# Allegro board arena_12-12_v3.brd
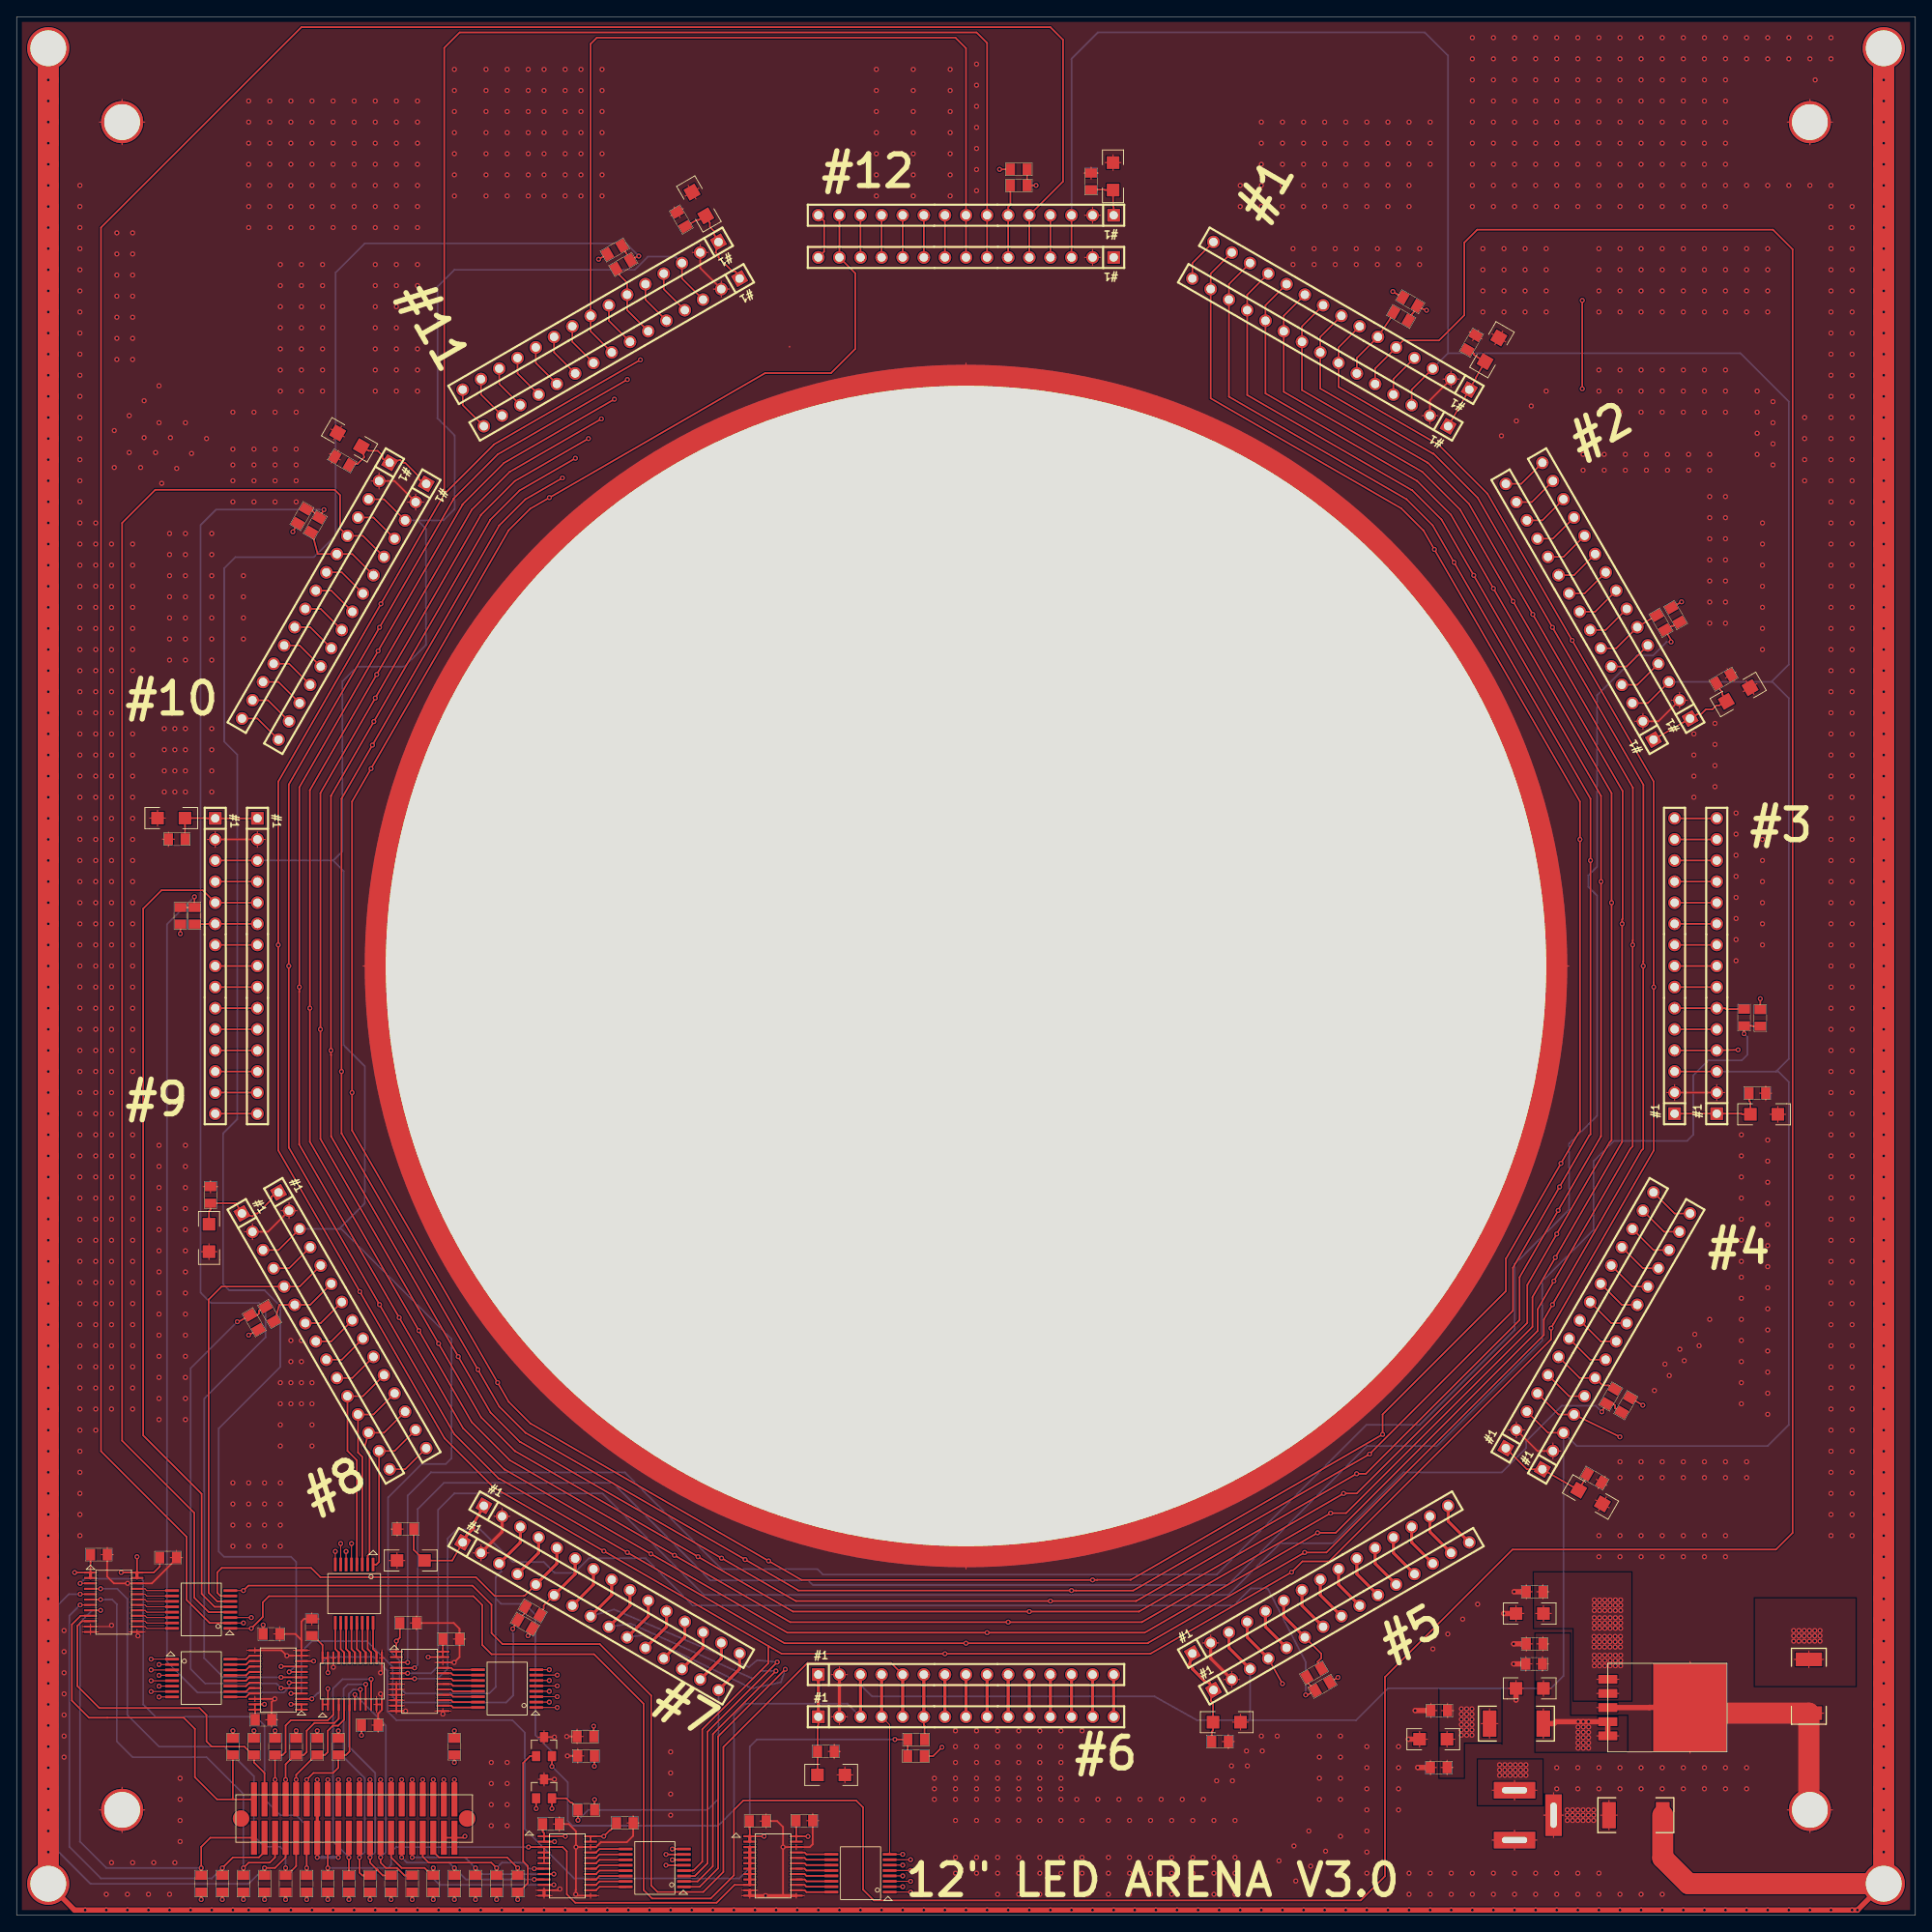
[diagram p0: board, top side]
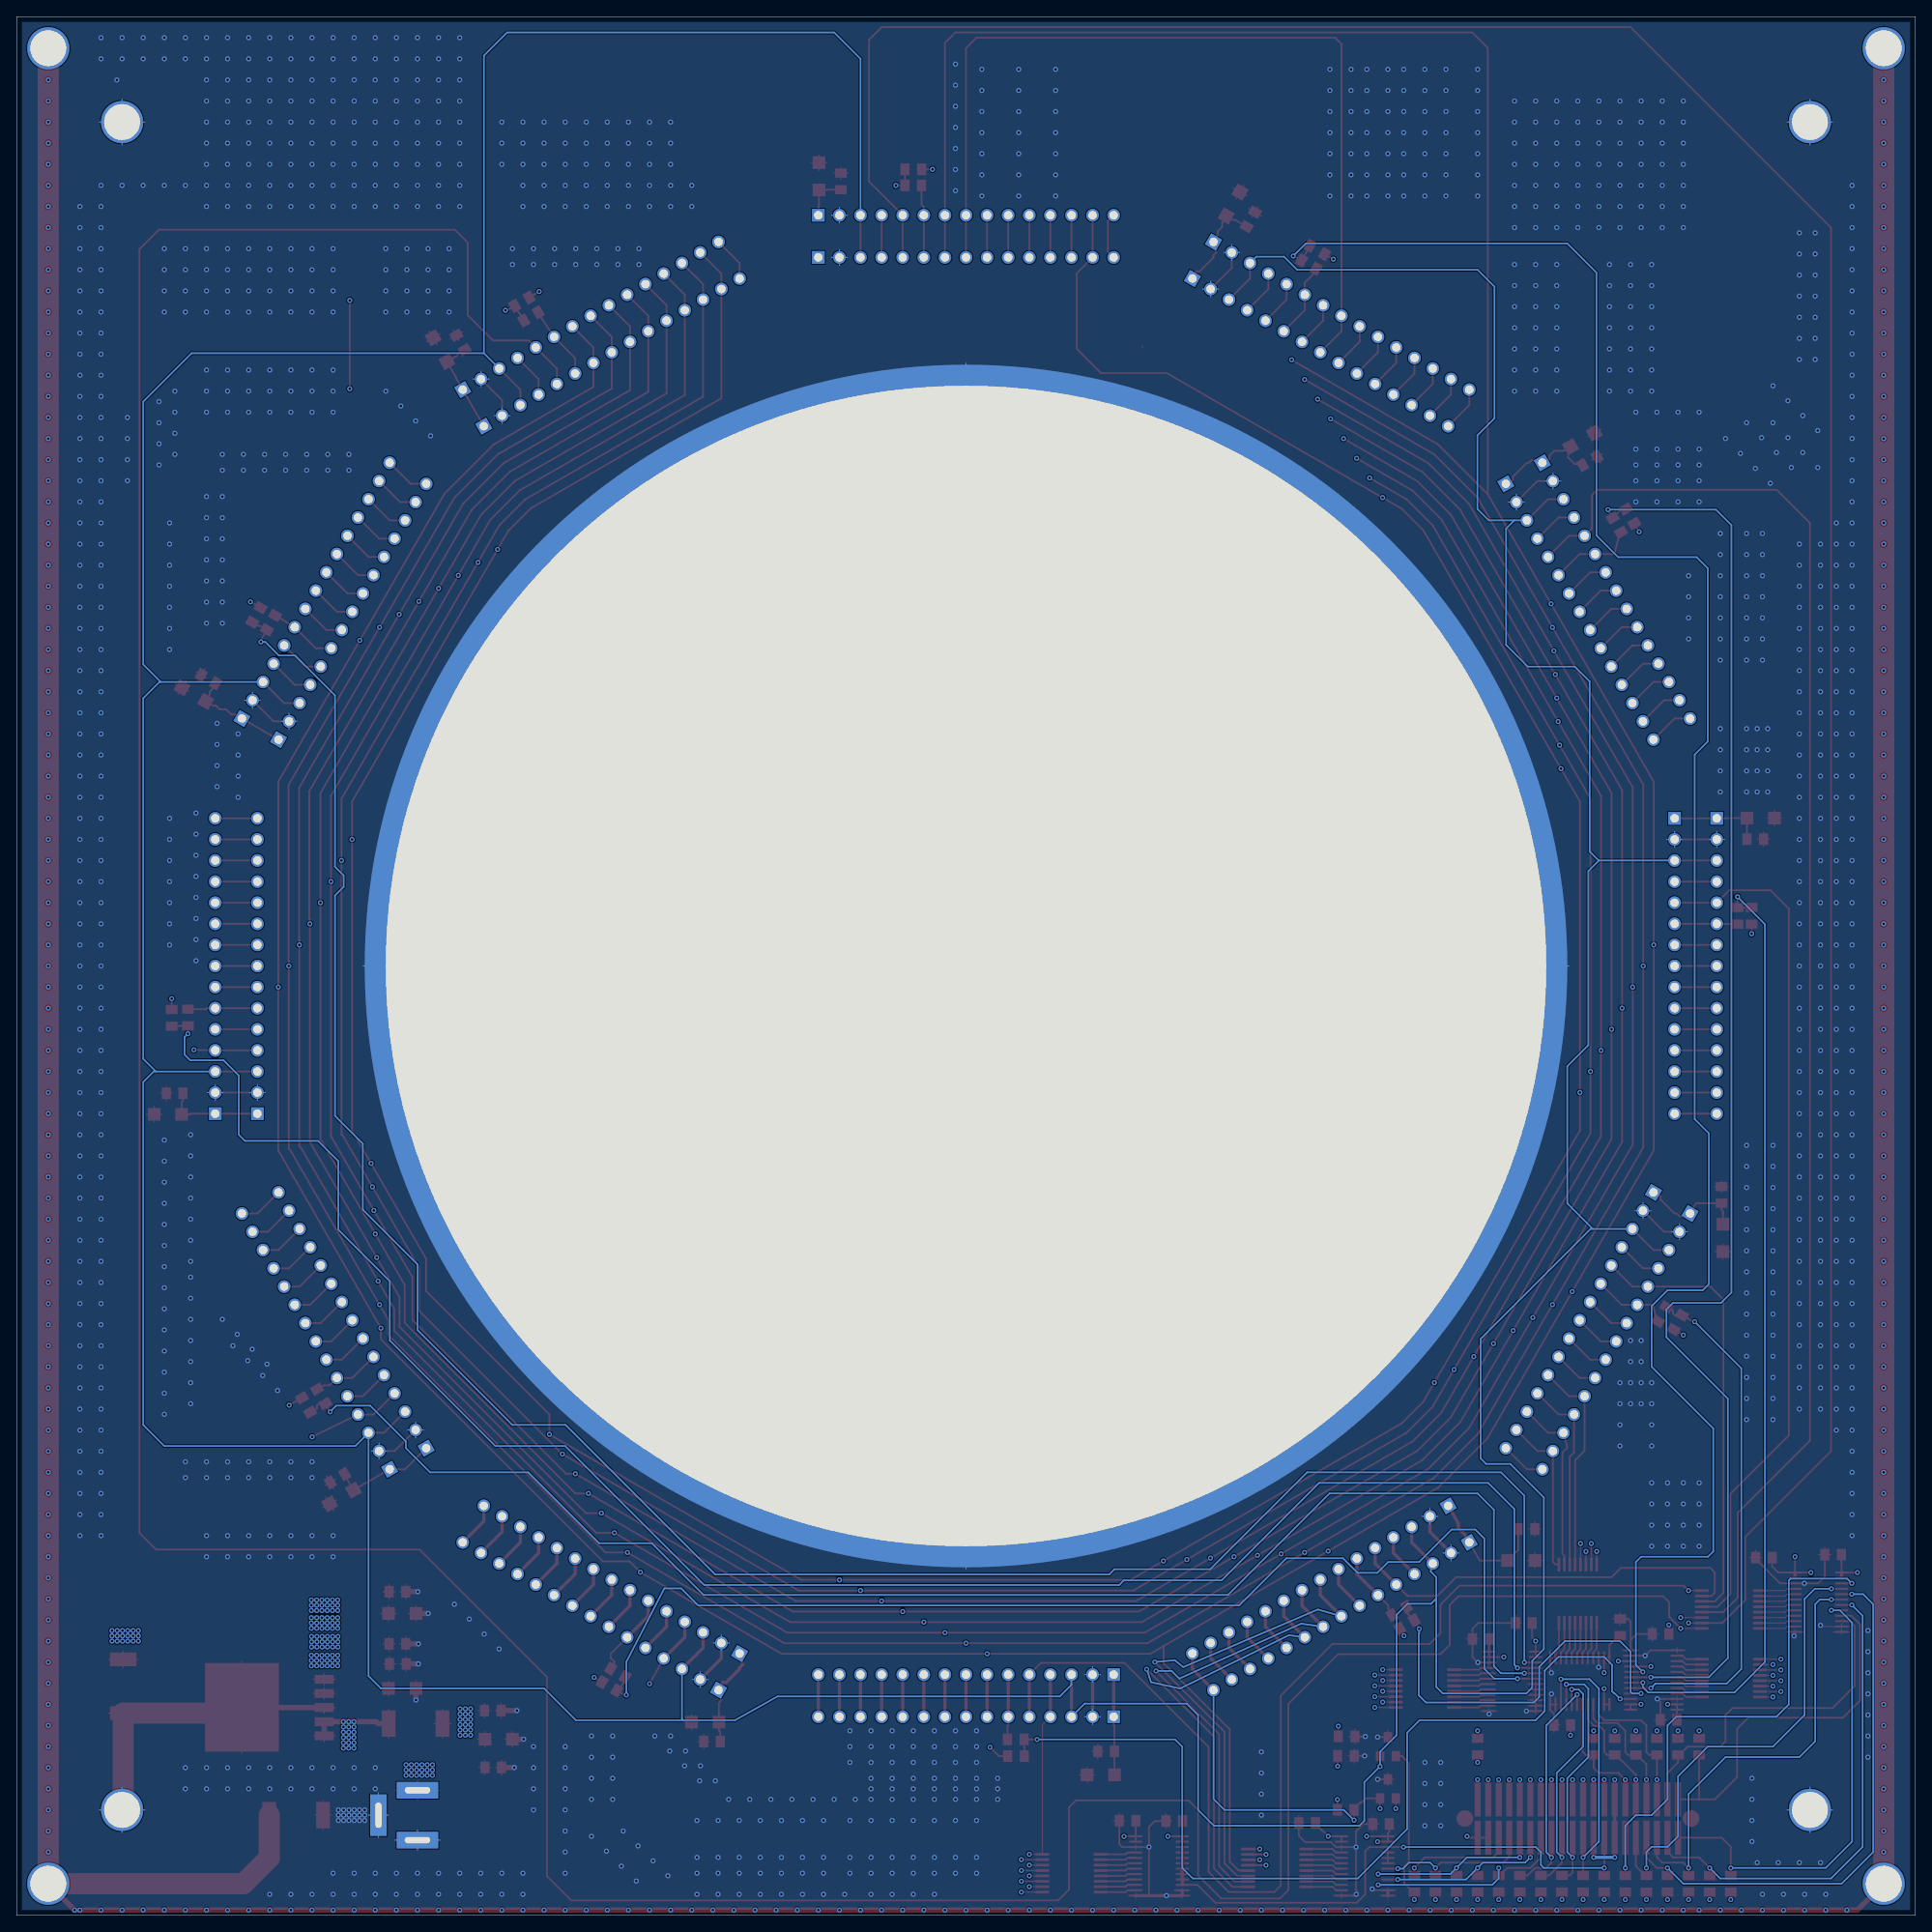
[diagram p1: board, bottom side, seen from below]

Outline 228.6 x 228.6 mm; copper layers: TOP, PWR, LAYER 1, GND2, LAYER 2, BOTTOM. Coordinates in mm from the lower left corner of the outline.
Outline path: 0,228.6 0,0 228.6,0 228.6,228.6 0,228.6

## Design rules (mm)
constraint set DEFAULT: min track width 0.127

## Placement (name value [footprint] x y rotation side)
C1  10uF  [1206]  82.14 206.04 120 top
C2  10uF  [1206]  132 209.37 90 top
C3  0.1uF  [EIA0805]  175.16 189.36 60 top
C4  10uF  [1206]  177.62 188.49 60 top
C5  0.1uF  [EIA0805]  129.36 208.76 90 top
C6  0.1uF  [EIA0805]  80.01 204.19 120 top
C7  0.1uF  [0805]  39.19 175.11 150 top
C8  10uF  [1206]  40.08 177.65 150 top
C9  10uF  [1206]  210.39 96.44 0 top
C10  0.1uF  [EIA0805]  209.58 98.98 0 top
C11  10uF  [1206]  18.62 132.11 180 top
C12  0.1uF  [EIA0805]  19.28 129.57 180 top
C13  10uF  [1206]  189.48 50.37 330 top
C14  0.1uF  [EIA0805]  189.97 52.63 330 top
C15  10uF  [1206]  47.45 42.72 180 top
C16  0.1uF  [EIA0805]  46.81 46.51 180 top
C17  10uF  [1206]  145.69 23.27 0 top
C18  0.1uF  [EIA0805]  144.88 20.93 0 top
C19  0.1uF  [EIA0805]  97.43 19.74 0 top
C20  10uF  [1206]  98.07 16.92 0 top
C21  10uF  [1206]  23.16 81.56 270 top
C22  0.1uF  [EIA0805]  23.34 86.74 90 top
C23  10uF  [1206]  207.26 146.99 30 top
C24  0.1uF  [EIA0805]  205.51 148.84 30 top
C25  0.1uF  [EIA0805]  64.34 11 0 top
C26  0.1uF  [EIA0805]  73.23 11.13 0 top
C27  0.1uF  [EIA0805]  29.72 23.55 0 top
C28  0.1uF  [EIA0805]  35.53 34.7 90 top
C29  0.1uF  [EIA0805]  89.23 11.35 0 top
C30  0.1uF  [EIA0805]  94.84 11.4 0 top
C31  0.1uF  [EIA0805]  42.52 22.91 0 top
C32  0.1uF  [EIA0805]  30.68 33.88 0 top
C33  0.1uF  [EIA0805]  9.91 43.43 0 top
C34  0.1uF  [EIA0805]  18.24 43.08 0 top
C35  0.1uF  [EIA0805]  52.32 33.27 0 top
C36  0.1uF  [EIA0805]  47.14 35.2 0 top
C37  0.1uF  [EIA0805]  182.75 38.96 180 top
C38  10uF  [1206]  182.17 36.35 180 top
C39  10uF/6.3/Elec  [1206]  182.17 27.33 180 top
C40  0.001uF/X5R  [EIA0805]  182.7 30.28 180 top
C41  0.1uF/X5R  [EIA0805]  182.75 32.69 180 top
C42  2.2uF/60/Elec  [1206]  170.56 21.21 180 top
C43  0.01uF/X5R  [EIA0805]  171.22 17.81 180 top
C44  0.1uF/X5R  [EIA0805]  171.27 24.66 180 top
J1  CONN15  [HDR-1X15]  56.25 49.31 330 top
J2  CONN15  [HDR-1X15]  179.29 56.25 60 top
J3  CONN15  [HDR-1X15]  197.07 141.56 120 top
J4  CONN15  [HDR-1X15]  96.52 28.99 0 top
J5  CONN15  [HDR-1X15]  28.99 132.08 270 top
J6  CONN15  [HDR-1X15]  87.04 197.07 210 top
J7  CONN15  [HDR-1X15]  172.35 179.29 150 top
J8  CONN15  [HDR-1X15]  141.56 31.53 30 top
J9  CONN15  [HDR-1X15]  199.61 96.52 90 top
J10  CONN15  [HDR-1X15]  31.53 87.04 300 top
J11  CONN15  [HDR-1X15]  132.08 204.69 180 top
J12  CONN15  [HDR-1X15]  44.91 174.89 240 top
J13  CONN15  [HDR-1X15]  96.52 23.91 0 top
J14  CONN15  [HDR-1X15]  53.71 44.91 330 top
J15  CONN15  [HDR-1X15]  27.13 84.5 300 top
J16  CONN15  [HDR-1X15]  23.91 132.08 270 top
J17  CONN15  [HDR-1X15]  49.31 172.35 240 top
J18  CONN15  [HDR-1X15]  84.5 201.47 210 top
J19  CONN15  [HDR-1X15]  132.08 199.61 180 top
J20  CONN15  [HDR-1X15]  174.89 183.69 150 top
J21  CONN15  [HDR-1X15]  201.47 144.1 120 top
J22  CONN15  [HDR-1X15]  204.69 96.52 90 top
J23  CONN15  [HDR-1X15]  183.69 53.71 60 top
J24  CONN15  [HDR-1X15]  144.1 27.13 30 top
J25  A35051-ND (68pin, 1.27mm pitch, Through hold, A113405-ND)  [SMV_2X20]  52.7 13.97 270 top
J26  CP-102A-ND  [PJ102A]  180.34 12.06 180 top
L1  Ferrite Bead/5-15Ohm  [EIA2512]  194.94 12.06 0 top
L2  Ferrite Bead/5-15Ohm  [EIA2512]  215.77 27.58 270 top
L3  Ferrite Bead/5-15Ohm  [EIA2512]  180.57 23.09 180 top
M1  TEST POINT  [8-32]  224.79 3.81 0 top
M2  TEST POINT  [8-32]  3.81 3.81 0 top
M3  TEST POINT  [8-32]  215.9 12.7 0 top
M4  TEST POINT  [8-32]  12.7 12.7 0 top
M5  TEST POINT  [8-32]  215.9 215.9 0 top
M6  TEST POINT  [8-32]  12.7 215.9 0 top
M7  TEST POINT  [8-32]  3.81 224.79 0 top
M8  TEST POINT  [8-32]  224.79 224.79 0 top
M9  TEST POINT  [1-32]  114.3 114.3 0 top
NOREF  -  []  135.59 180.83 0 top
NOREF#2  -  []  228.6 0 90 top
NOREF#3  -  []  0 228.6 0 top
Q1  MTD4P06  [SOT-23]  63.5 20.32 0 top
Q3  MTD4P06  [SOT-23]  63.5 15.24 0 top
R1  27  [EIA0805]  108.31 21.18 0 top
R2  27  [EIA0805]  62.13 36.65 330 top
R3  27  [EIA0805]  30.48 72.39 300 top
R4  27  [EIA0805]  21.41 120.35 270 top
R5  27  [EIA0805]  35.94 167.39 240 top
R6  27  [EIA0805]  73.03 198.75 210 top
R7  27  [EIA0805]  120.65 208.28 180 top
R8  27  [EIA0805]  166.67 192.51 150 top
R9  27  [EIA0805]  197.97 155.65 120 top
R10  27  [EIA0805]  207.98 108.1 90 top
R11  27  [EIA0805]  191.92 62.48 60 top
R12  27  [EIA0805]  156.21 29.21 30 top
R13  200  [EIA0805]  60.32 3.81 270 top
R14  20K  [EIA0805]  68.55 19.2 0 top
R17  200  [EIA0805]  52.7 20.32 90 top
R18  20K  [EIA0805]  68.48 21.54 0 top
R19  4.7K  [EIA0805]  37.47 3.81 270 top
R20  4.7K  [EIA0805]  68.58 12.7 180 top
R21  4.7K  [EIA0805]  28.58 20.32 90 top
R22  4.7K  [EIA0805]  26.03 20.32 90 top
R23  4.7K  [EIA0805]  22.22 3.81 270 top
R24  4.7K  [EIA0805]  24.77 3.81 270 top
R25  4.7K  [EIA0805]  27.3 3.81 270 top
R26  4.7K  [EIA0805]  29.84 3.81 270 top
R27  4.7K  [EIA0805]  32.38 3.81 270 top
R28  4.7K  [EIA0805]  34.92 3.81 270 top
R29  4.7K  [EIA0805]  40 3.81 270 top
R30  4.7K  [EIA0805]  42.55 3.81 270 top
R31  4.7K  [EIA0805]  45.08 3.81 270 top
R32  4.7K  [EIA0805]  47.62 3.81 270 top
R33  4.7K  [EIA0805]  38.73 20.32 90 top
R34  4.7K  [EIA0805]  36.19 20.32 90 top
R35  4.7K  [EIA0805]  33.66 20.32 90 top
R36  4.7K  [EIA0805]  31.11 20.32 90 top
R37  4.7K  [EIA0805]  167.77 194.28 150 top
R38  4.7K  [EIA0805]  120.65 210.21 180 top
R39  4.7K  [EIA0805]  72.01 200.51 210 top
R40  4.7K  [EIA0805]  34.34 168.45 240 top
R41  4.7K  [EIA0805]  19.71 120.35 270 top
R42  4.7K  [EIA0805]  28.6 71.4 300 top
R43  4.7K  [EIA0805]  61.21 35.05 330 top
R44  4.7K  [EIA0805]  108.28 19.18 0 top
R49  4.7K  [EIA0805]  157.23 27.58 30 top
R50  4.7K  [EIA0805]  193.75 61.44 60 top
R51  4.7K  [EIA0805]  209.93 108.05 90 top
R52  4.7K  [EIA0805]  199.72 156.57 120 top
R57  4.7K  [EIA0805]  50.16 3.81 270 top
R58  4.7K  [EIA0805]  52.7 3.81 270 top
R59  4.7K  [EIA0805]  55.24 3.81 270 top
R60  4.7K  [EIA0805]  57.78 3.81 270 top
RN1  20  [SSOP16]  22.22 36.83 180 top
RN2  20  [SSOP16]  101.6 5.08 180 top
RN3  20  [SSOP16]  22.22 28.58 0 top
RN4  20  [SSOP16]  40.64 38.73 270 top
RN5  20  [SSOP16]  76.83 5.72 180 top
RN6  20  [SSOP16]  59.05 27.3 180 top
U1  SN74LVC8T245  [TSSOP24]  8.89 41.27 0 top
U2  SN74LVC8T245  [TSSOP24]  34.29 24.77 180 top
U3  SN74LVC8T245  [TSSOP24]  88.27 9.52 0 top
U4  SN74LVC8T245  [TSSOP24]  36.83 25.4 90 top
U5  SN74LVC8T245  [TSSOP24]  63.5 9.52 0 top
U6  SN74LVC8T245  [TSSOP24]  45.72 31.75 0 top
U7  LT1764  [DD5]  191.57 28.42 0 top

## Library data of the parts
C1 C2 C4 C8 C9 C11 C13 C15 C17 C20 C21 C23 C38 = CAPACITOR POL
C3 C5-C7 C10 C12 C14 C16 C18 C19 C22 C24-C37 = CAPACITOR NON-POL
C39 C42 = CAPACITOR
C40 C41 C43 C44 = CAP NP
J1-J24 = CONN RECT 15_7
J25 = HEADER 34x2_1
J26 = HEADER 3
L1-L3 = BEADARR_4
M1-M9 = TEST POINT
Q1 Q3 = MTD4P06
R1-R14 R17-R44 R49-R52 R57-R60 = RESISTOR
RN1-RN6 = RESNW_IS_8
U1-U6 = SN7474LVC8T245
U7 = LT1764

## Footprints (pads in the part's own frame, mm; a bottom-side part is the same pattern mirrored in y, then rotated)
1-32
  round 144.78 hole 139.7: 1(0,0)
8-32
  round 5.08 hole 4.305: 1(0,0)
0805
  rect 1.1x1.4 smd: 1(-1.001,0) 2(1.001,0)
1206
  rect 1.524x1.524 smd: 1(-1.651,0) 2(1.651,0)
DD5
  rect 2.286x1.067 smd: 1(0,0) 2(0,-1.702) 3(0,-3.404) 4(0,-5.105) 5(0,-6.807)
  rect 8.89x10.668 smd: 6(9.906,-3.378)
EIA0805
  rect 1.1x1.4 smd: 1(-1.001,0) 2(1.001,0)
EIA2512
  rect 1.651x3.175 smd: 1(-3.239,0) 2(3.239,0)
HDR-1X15
  rect 1.524x1.524 hole 1.016: 1(0,0)
  round 1.524 hole 1.016: 2(2.54,0) 3(5.08,0) 4(7.62,0) 5(10.16,0) 6(12.7,0) 7(15.24,0) 8(17.78,0) 9(20.32,0) 10(22.86,0) 11(25.4,0) 12(27.94,0) 13(30.48,0) 14(33.02,0) 15(35.56,0)
PJ102A
  rect 5.001x1.999 hole 3.051x0.759: 1(0,-3) 2(0,3)
  rect 1.999x5.001 hole 0.759x3.051: 3(-4.699,0)
SMV_2X20
  round 1.999 smd: (2.309,1.539) (2.309,-25.69)
  rect 4.11x0.729 smd: 1(0,0) 2(0,-1.27) 3(0,-2.54) 4(0,-3.81) 5(0,-5.08) 6(0,-6.35) 7(0,-7.62) 8(0,-8.89) 9(0,-10.16) 10(0,-11.43) 11(0,-12.7) 12(0,-13.97) 13(0,-15.24) 14(0,-16.51) 15(0,-17.78) 16(0,-19.05) 17(0,-20.32) 18(0,-21.59) 19(0,-22.86) 20(0,-24.13) 21(4.62,-24.13) 22(4.62,-22.86) 23(4.62,-21.59) 24(4.62,-20.32) 25(4.62,-19.05) 26(4.62,-17.78) 27(4.62,-16.51) 28(4.62,-15.24) 29(4.62,-13.97) 30(4.62,-12.7) 31(4.62,-11.43) 32(4.62,-10.16) 33(4.62,-8.89) 34(4.62,-7.62) 35(4.62,-6.35) 36(4.62,-5.08) 37(4.62,-3.81) 38(4.62,-2.54) 39(4.62,-1.27) 40(4.62,0)
SOT-23
  rect 1.016x1.219 smd: 1(-0.953,-1.143) 2(0.953,-1.143) 3(0,1.143)
SSOP16
  rect 1.651x0.33 smd: 1(-3.505,2.276) 2(-3.505,1.626) 3(-3.505,0.975) 4(-3.505,0.325) 5(-3.505,-0.325) 6(-3.505,-0.975) 7(-3.505,-1.626) 8(-3.505,-2.276) 9(3.505,-2.276) 10(3.505,-1.626) 11(3.505,-0.975) 12(3.505,-0.325) 13(3.505,0.325) 14(3.505,0.975) 15(3.505,1.626) 16(3.505,2.276)
TSSOP24
  rect 1.549x0.249 smd: 1(0,0) 2(0,-0.65) 3(0,-1.3) 4(0,-1.951) 5(0,-2.601) 6(0,-3.251) 7(0,-3.899) 8(0,-4.549) 9(0,-5.199) 10(0,-5.85) 11(0,-6.5) 12(0,-7.15) 13(5.601,-7.15) 14(5.601,-6.5) 15(5.601,-5.85) 16(5.601,-5.199) 17(5.601,-4.549) 18(5.601,-3.899) 19(5.601,-3.251) 20(5.601,-2.601) 21(5.601,-1.951) 22(5.601,-1.3) 23(5.601,-0.65) 24(5.601,0)

## Nets
3.3VDC: C25.1 C27.1 C29.1 C31.1 C33.1 C35.1 C42.1 C43.1 C44.1 L3.2 R19.2 R21.2 R22.2 R23.2 R24.2 R25.2 R26.2 R27.2 R28.2 R29.2 R30.2 R31.2 R32.2 R33.2 R34.2 R35.2 R36.2 R57.2 R58.2 R59.2 R60.2 U1.1 U1.2 U2.23 U2.24 U3.1 U3.2 U4.1 U4.2 U5.1 U5.2 U6.23 U6.24
5VDC: C1.1 C2.1 C3.1 C4.1 C5.1 C6.1 C7.1 C8.1 C9.1 C10.1 C11.1 C12.1 C13.1 C14.1 C15.1 C16.1 C17.1 C18.1 C19.1 C20.1 C21.1 C22.1 C23.1 C24.1 C26.1 C28.1 C30.1 C32.1 C34.1 C36.1 C37.1 C38.1 J1.1 J2.1 J3.1 J4.1 J5.1 J6.1 J7.1 J8.1 J9.1 J10.1 J11.1 J12.1 J13.1 J14.1 J15.1 J16.1 J17.1 J18.1 J19.1 J20.1 J21.1 J22.1 J23.1 J24.1 J26.1 R20.1 R37.2 R38.2 R39.2 R40.2 R41.2 R42.2 R43.2 R44.2 R49.2 R50.2 R51.2 R52.2 U1.23 U1.24 U2.1 U2.2 U3.23 U3.24 U4.23 U4.24 U5.23 U5.24 U6.1 U6.2 U7.1 U7.2
GND: C1.2 C2.2 C3.2 C4.2 C5.2 C6.2 C7.2 C8.2 C9.2 C10.2 C11.2 C12.2 C13.2 C14.2 C15.2 C16.2 C17.2 C18.2 C19.2 C20.2 C21.2 C22.2 C23.2 C24.2 C25.2 C26.2 C27.2 C28.2 C29.2 C30.2 C31.2 C32.2 C33.2 C34.2 C35.2 C36.2 C37.2 C38.2 C39.2 C40.2 C41.2 C42.2 C43.2 C44.2 J1.2 J2.2 J3.2 J4.2 J5.2 J6.2 J7.2 J8.2 J9.2 J10.2 J11.2 J12.2 J13.2 J14.2 J15.2 J16.2 J17.2 J18.2 J19.2 J20.2 J21.2 J22.2 J23.2 J24.2 J26.2 J26.3 L1.1 L2.2 M3.1 M4.1 M5.1 M6.1 M9.1 Q1.3(S) Q3.3(S) R14.1 R18.1 U1.11 U1.12 U1.13 U1.22(\\O\E\) U2.11 U2.12 U2.13 U2.22(\\O\E\) U3.11 U3.12 U3.13 U3.22(\\O\E\) U4.11 U4.12 U4.13 U4.22(\\O\E\) U5.11 U5.12 U5.13 U5.22(\\O\E\) U6.7 U6.8 U6.9 U6.10 U6.11 U6.12 U6.13 U6.22(\\O\E\) U7.3 U7.6
GND_SIGNAL: J25.14 J25.27 J25.29 J25.39 J25.40 L2.1
CS0: J1.7 J2.7 J3.7 J4.7 J5.7 J6.7 J7.7 J8.7 J9.7 J10.7 J11.7 J12.7 J13.7 J14.7 J15.7 J16.7 J17.7 J18.7 J19.7 J20.7 J21.7 J22.7 J23.7 J24.7 RN5.4
CS1: J1.8 J2.8 J3.8 J4.8 J5.8 J6.8 J7.8 J8.8 J9.8 J10.8 J11.8 J12.8 J13.8 J14.8 J15.8 J16.8 J17.8 J18.8 J19.8 J20.8 J21.8 J22.8 J23.8 J24.8 RN5.3
CS2: J1.9 J2.9 J3.9 J4.9 J5.9 J6.9 J7.9 J8.9 J9.9 J10.9 J11.9 J12.9 J13.9 J14.9 J15.9 J16.9 J17.9 J18.9 J19.9 J20.9 J21.9 J22.9 J23.9 J24.9 RN5.2
CS3: J1.10 J2.10 J3.10 J4.10 J5.10 J6.10 J7.10 J8.10 J9.10 J10.10 J11.10 J12.10 J13.10 J14.10 J15.10 J16.10 J17.10 J18.10 J19.10 J20.10 J21.10 J22.10 J23.10 J24.10 RN5.1
CS4: J1.11 J2.11 J3.11 J4.11 J5.11 J6.11 J7.11 J8.11 J9.11 J10.11 J11.11 J12.11 J13.11 J14.11 J15.11 J16.11 J17.11 J18.11 J19.11 J20.11 J21.11 J22.11 J23.11 J24.11 RN4.4
CS5: J1.12 J2.12 J3.12 J4.12 J5.12 J6.12 J7.12 J8.12 J9.12 J10.12 J11.12 J12.12 J13.12 J14.12 J15.12 J16.12 J17.12 J18.12 J19.12 J20.12 J21.12 J22.12 J23.12 J24.12 RN4.3
CS6: J1.13 J2.13 J3.13 J4.13 J5.13 J6.13 J7.13 J8.13 J9.13 J10.13 J11.13 J12.13 J13.13 J14.13 J15.13 J16.13 J17.13 J18.13 J19.13 J20.13 J21.13 J22.13 J23.13 J24.13 RN4.2
CS7: J1.14 J2.14 J3.14 J4.14 J5.14 J6.14 J7.14 J8.14 J9.14 J10.14 J11.14 J12.14 J13.14 J14.14 J15.14 J16.14 J17.14 J18.14 J19.14 J20.14 J21.14 J22.14 J23.14 J24.14 RN4.1
CS_IN_0: J25.37 R60.1 U5.7
CS_IN_1: J25.36 R59.1 U5.8
CS_IN_2: J25.35 R58.1 U5.9
CS_IN_3: J25.34 R57.1 U5.10
CS_IN_4: J25.33 R32.1 U4.7
CS_IN_5: J25.32 R31.1 U4.8
CS_IN_6: J25.31 R30.1 U4.9
CS_IN_7: J25.30 R29.1 U4.10
EXT_INT: J1.15 J2.15 J3.15 J4.15 J5.15 J6.15 J7.15 J8.15 J9.15 J10.15 J11.15 J12.15 J13.15 J14.15 J15.15 J16.15 J17.15 J18.15 J19.15 J20.15 J21.15 J22.15 J23.15 J24.15 Q3.2 R20.2
EXT_INT_IN: J25.1 R17.1
MISO_0: R1.1 R44.1 U2.3
MISO_1: R2.1 R43.1 U2.4
MISO_2: R3.1 R42.1 U2.5
MISO_3: R4.1 R41.1 U2.6
MISO_4: R5.1 R40.1 U2.7
MISO_5: R6.1 R39.1 U2.8
MISO_6: R7.1 R38.1 U2.9
MISO_7: R8.1 R37.1 U2.10
MISO_8: R9.1 R52.1 U6.3
MISO_9: R10.1 R51.1 U6.4
MISO_10: R11.1 R50.1 U6.5
MISO_11: R12.1 R49.1 U6.6
MISO_OUT_0: J25.13 RN3.8
MISO_OUT_1: J25.12 RN3.7
MISO_OUT_2: J25.11 RN3.6
MISO_OUT_3: J25.10 RN3.5
MISO_OUT_4: J25.9 RN3.4
MISO_OUT_5: J25.8 RN3.3
MISO_OUT_6: J25.7 RN3.2
MISO_OUT_7: J25.6 RN3.1
MISO_OUT_8: J25.5 RN6.8
MISO_OUT_9: J25.4 RN6.7
MISO_OUT_10: J25.3 RN6.6
MISO_OUT_11: J25.2 RN6.5
MOSI_0: J4.5 J13.5 RN1.8
MOSI_1: J1.5 J14.5 RN1.7
MOSI_2: J10.5 J15.5 RN1.6
MOSI_3: J5.5 J16.5 RN1.5
MOSI_4: J12.5 J17.5 RN1.4
MOSI_5: J6.5 J18.5 RN1.3
MOSI_6: J11.5 J19.5 RN1.2
MOSI_7: J7.5 J20.5 RN1.1
MOSI_8: J3.5 J21.5 RN4.8
MOSI_9: J9.5 J22.5 RN4.7
MOSI_10: J2.5 J23.5 RN4.6
MOSI_11: J8.5 J24.5 RN4.5
MOSI_IN_0: J25.26 R28.1 U1.3
MOSI_IN_1: J25.25 R27.1 U1.4
MOSI_IN_2: J25.24 R26.1 U1.5
MOSI_IN_3: J25.23 R25.1 U1.6
MOSI_IN_4: J25.22 R24.1 U1.7
MOSI_IN_5: J25.21 R23.1 U1.8
MOSI_IN_6: J25.20 R22.1 U1.9
MOSI_IN_7: J25.19 R21.1 U1.10
MOSI_IN_8: J25.18 R36.1 U4.3
MOSI_IN_9: J25.17 R35.1 U4.4
MOSI_IN_10: J25.16 R34.1 U4.5
MOSI_IN_11: J25.15 R33.1 U4.6
RESET: J1.3 J2.3 J3.3 J4.3 J5.3 J6.3 J7.3 J8.3 J9.3 J10.3 J11.3 J12.3 J13.3 J14.3 J15.3 J16.3 J17.3 J18.3 J19.3 J20.3 J21.3 J22.3 J23.3 J24.3 Q1.2
RESET_IN: J25.38 R13.1
SCK_0: J4.4 J13.4 RN2.8
SCK_1: J1.4 J14.4 RN2.7
SCK_2: J10.4 J15.4 RN2.6
SCK_3: J5.4 J16.4 RN2.5
SCK_4: J12.4 J17.4 RN2.4
SCK_5: J6.4 J18.4 RN2.3
SCK_6: J11.4 J19.4 RN2.2
SCK_7: J7.4 J20.4 RN2.1
SCK_8: J3.4 J21.4 RN5.8
SCK_9: J9.4 J22.4 RN5.7
SCK_10: J2.4 J23.4 RN5.6
SCK_11: J8.4 J24.4 RN5.5
SCK_IN_0: J25.28 R19.1 U3.3 U3.4 U3.5 U3.6 U3.7 U3.8 U3.9 U3.10 U5.3 U5.4 U5.5 U5.6
N00182: J4.6 J13.6 R1.2
N04213: J1.6 J14.6 R2.2
N04860: J10.6 J15.6 R3.2
N05048: J5.6 J16.6 R4.2
N06135: J12.6 J17.6 R5.2
N06323: J6.6 J18.6 R6.2
N06511: J11.6 J19.6 R7.2
N06699: J7.6 J20.6 R8.2
N07866: J3.6 J21.6 R9.2
N08054: J9.6 J22.6 R10.2
N08430: J8.6 J24.6 R12.2
N65117: J2.6 J23.6 R11.2
N65750: Q1.1 R13.2 R14.2
N124786: C39.1 C40.1 C41.1 L3.1 U7.4 U7.5(SENSE)
N207682: Q3.1 R17.2 R18.2
N248336: L1.2 M1.1 M2.1 M7.1 M8.1
N926808: RN3.9 U2.21
N926809: RN3.10 U2.20
N935118: RN2.9 U3.21
N935119: RN2.10 U3.20
N953908: RN1.9 U1.21
N953909: RN1.10 U1.20
N9268010: RN3.11 U2.19
N9268011: RN3.12 U2.18
N9268012: RN3.13 U2.17
N9268013: RN3.14 U2.16
N9268014: RN3.15 U2.15
N9268015: RN3.16 U2.14
N9351110: RN2.11 U3.19
N9351111: RN2.12 U3.18
N9351112: RN2.13 U3.17
N9351113: RN2.14 U3.16
N9351114: RN2.15 U3.15
N9351115: RN2.16 U3.14
N9539010: RN1.11 U1.19
N9539011: RN1.12 U1.18
N9539012: RN1.13 U1.17
N9539013: RN1.14 U1.16
N9539014: RN1.15 U1.15
N9539015: RN1.16 U1.14
N10228215: RN4.9 U4.21
N10228216: RN4.10 U4.20
N10228217: RN4.11 U4.19
N10228218: RN4.12 U4.18
N10228219: RN4.13 U4.17
N10228220: RN4.14 U4.16
N10228221: RN4.15 U4.15
N10228222: RN4.16 U4.14
N10904015: RN5.9 U5.21
N10904016: RN5.10 U5.20
N10904017: RN5.11 U5.19
N10904018: RN5.12 U5.18
N10904019: RN5.13 U5.17
N10904020: RN5.14 U5.16
N10904021: RN5.15 U5.15
N10904022: RN5.16 U5.14
N11250315: RN6.9 U6.21
N11250316: RN6.10 U6.20
N11250317: RN6.11 U6.19
N11250318: RN6.12 U6.18
N11250319: RN6.13 U6.17
N11250320: RN6.14 U6.16
N11250321: RN6.15 U6.15
N11250322: RN6.16 U6.14

Pads without a net: RN6 1 2 3 4

## Via types
v1: diameter 0.61, hole 0.33, TOP to BOTTOM, 1989 vias

## Routing (per net, layer and track width the routed paths; a pad name or vN(x,y) marks a point on that pad's centre or on a via; arc(x,y) is an arc through that point)
3.3VDC: length 59.5
  TOP w0.127: C42.1 172.21,22.15 ; C42.1 173.15,21.21 ; C42.1 172.21,20.27 ; L3.2 178.34,23.09 ; L3.2 177.33,21.32 ; L3.2 176.32,23.09 ; L3.2 177.33,24.86 ; C44.1 173,24.66 ; C44.1 171.54,24.66 ; C44.1 172.27,25.54 ; C44.1 172.27,23.78 ; C43.1 172.22,18.69 ; C43.1 171.49,17.81 ; C43.1 172.22,16.92 ; C43.1 172.95,17.81
  TOP w0.203: R57.2 v1(50.16,1.91) ; U5.1 63.5,9.91 63.34,10.07 C25.1 ; U5.1 v1(66.07,9.52) ; U5.1 U5.2 v1(64.75,8.87) ; R33.2 v1(38.73,22.22) ; R26.2 v1(29.84,1.91) ; R25.2 v1(27.3,1.91) ; R35.2 v1(33.66,22.22) ; R22.2 v1(26.03,22.22) ; v1(6.98,41.27) U1.1 8.89,42.49 8.91,42.5 C33.1 ; C29.1 88.23,10.42 88.27,10.39 U3.1 v1(89.99,9.52) ; R36.2 v1(31.11,22.22) ; R59.2 v1(55.24,1.91) ; R58.2 v1(52.7,1.91) ; R24.2 v1(24.77,1.91) ; R23.2 v1(22.22,1.91) ; R34.2 v1(36.19,22.22) ; R29.2 v1(40,1.91) ; C27.1 28.72,24.74 U2.24 U2.23 v1(29.83,25.42) ; R21.2 v1(28.58,22.22) ; R27.2 v1(32.38,1.91) ; v1(37.48,27.29) U4.2 U4.1 ; R28.2 v1(34.92,1.91) ; R60.2 v1(57.78,1.91) ; C35.1 51.32,32.11 51.32,32.1 U6.24 U6.23 v1(49.55,31.1) ; C31.1 v1(41.52,21.68) ; R32.2 v1(47.62,1.91) ; R30.2 v1(42.55,1.91) ; R31.2 v1(45.08,1.91) ; R19.2 v1(37.47,1.91)
  TOP w0.381: U1.2 U1.1 ; U3.2 U3.1
  vias: v1(173.94,24.87) v1(173.94,24.23) v1(173.94,23.6) v1(173.94,22.96) v1(173.94,22.33) v1(173.94,21.69) v1(174.57,24.87) v1(174.57,24.23) v1(174.57,23.6) v1(174.57,22.96) v1(174.57,22.33) v1(174.57,21.69) v1(175.21,24.87) v1(175.21,24.23) v1(175.21,23.6) v1(175.21,22.96) v1(175.21,22.33) v1(175.21,21.69)
5VDC: length 313.4
  TOP w0.127: U7.1 191.57,29.14 ; U7.1 191.57,27.71 ; U7.1 192.89,28.42 ; U7.1 190.24,28.42 ; 190.24,26.72 U7.2 ; U7.2 191.57,27.43 ; U7.2 192.89,26.72 ; U7.2 191.57,26.01 ; 183.02,38.96 C37.1 ; C37.1 183.75,39.84 ; C37.1 184.49,38.96 ; C37.1 183.75,38.08 ; 180.34,13.88 J26.1 ; J26.1 177.66,15.06 ; J26.1 183.02,15.06 ; J26.1 180.34,16.25 ; C38.1 183.82,37.29 ; C38.1 184.76,36.35 ; C38.1 182.88,36.35 ; C38.1 183.82,35.41 ; C32.1 v1(29.68,34.97)
  TOP w0.203: v1(37.48,29.23) U4.23 U4.24 36.83,32.55 35.68,33.7 C28.1 ; R43.2 v1(61.57,33.67) ; C20.1 96.42,18.79 96.43,18.81 C19.1 96.43,22.83 96.52,22.92 J13.1 ; C7.1 40.13,174.74 41.03,174.74 41.85,175.56 C8.1 42.37,176.33 43.47,176.33 44.05,175.75 44.05,175.39 J12.1 46.17,175.23 46.51,174.89 46.77,174.89 48.45,173.21 48.45,172.85 J17.1 ; C21.1 23.16,84.78 23.34,84.96 C22.1 26.42,85.74 J15.1 28.39,84.17 28.73,84.5 28.99,84.5 30.67,86.18 30.67,86.55 J10.1 ; J11.1 132.08,205.68 132,205.76 C2.1 131.01,207.72 130.97,207.76 C5.1 ; C3.1 175.46,188.03 175.46,187.89 175.65,187.71 175.79,187.71 175.94,187.56 C4.1 175.7,185.16 175.7,185.08 J20.1 174.4,182.83 172.85,180.15 J7.1 ; R49.2 v1(159.08,28.65) ; J6.1 86.55,197.93 86.18,197.93 84.5,199.61 84.5,199.87 84.17,200.21 J18.1 84.01,202.33 84.01,202.73 83.46,203.27 83.46,203.76 C1.1 82.11,204.12 81.89,204.12 C6.1 ; U6.2 U6.1 v1(45.72,33.02) 46.14,33.44 C36.1 ; U1.24 v1(14.49,43.18) ; U1.24 16.51,41.27 17.25,42.01 17.25,43.07 C34.1 ; U1.24 v1(12.59,41.27) ; R38.2 v1(118.34,210.21) ; C26.1 72.23,10.98 71.51,10.26 71.42,10.26 v1(70.69,9.52) U5.24 U5.23 ; U3.24 94.87,9.52 v1(95.28,9.5) ; U3.24 U3.23 ; U3.24 93.87,10.45 93.84,10.47 C30.1 ; J3.1 197.93,142.05 200.61,143.6 J21.1 202.33,144.59 202.77,144.59 203.37,145.19 204.16,145.19 204.63,145.67 204.98,145.67 C23.1 205.34,147.02 205.34,147.31 205.11,147.54 204.65,148.34 ; 194.25,62.31 v1(195.78,61.42) ; R20.1 v1(69.58,13.94) ; R37.2 166.23,195.17 v1(165.68,195.5) ; v1(111.4,20.24) 110.34,19.18 R44.2 ; R52.2 v1(200.45,158.14) ; J2.1 181.83,53.71 J23.1 186.07,52.34 186.07,52.34 C13.1 189.1,53.01 C14.1 ; J24.1 143.76,25.87 144.04,25.58 C17.1 144.04,22.28 143.88,22.11 C18.1 ; C16.1 47.81,44.01 C15.1 52.45,42.72 J14.1 ; 29.1,70.53 v1(27.94,69.86) ; v1(33.04,25.42) U2.2 U2.1 ; C12.1 20.28,131.1 20.27,131.11 C11.1 22.9,132.11 22.92,132.08 J16.1 J5.1 ; R39.2 v1(70.07,199.39) ; J9.1 J22.1 207.67,96.52 207.75,96.44 C9.1 208.74,97.89 208.57,98.05 C10.1 ; R41.2 v1(19.71,118.19) ; R51.2 v1(209.93,110.36) ; R40.2 v1(33.26,166.57)
  TOP w0.381: J4.1 J13.1 ; J8.1 141.19,30.18 141.56,29.81 141.56,29.67 143.16,28.07 143.56,28.07 J24.1 ; J14.1 54.25,45.85 55.03,46.62 55.03,47.2 J1.1 ; U1.23 U1.24
  PWR w0.127: J2.1 180.23,56.25 ; J2.1 179.29,55.31 ; J2.1 179.29,57.19 ; J2.1 178.35,56.25 ; J19.1 132.08,200.55 ; J19.1 132.08,198.67 ; J19.1 131.14,199.61 ; J19.1 133.02,199.61 ; J8.1 141.56,32.47 ; J8.1 142.5,31.53 ; J8.1 140.61,31.53 ; J8.1 141.56,30.59 ; 49.31,171.41 J17.1 ; J17.1 50.25,172.35 ; J17.1 49.31,173.29 ; J17.1 48.37,172.35 ; 95.58,28.99 J4.1 ; J4.1 96.52,29.93 ; J4.1 96.52,28.05 ; J4.1 97.46,28.99 ; J15.1 28.07,84.5 ; J15.1 26.19,84.5 ; J15.1 27.13,85.45 ; J15.1 27.13,83.56 ; J5.1 28.99,133.02 ; J5.1 28.05,132.08 ; J5.1 28.99,131.14 ; J5.1 29.93,132.08 ; J14.1 53.71,45.85 ; J14.1 52.77,44.91 ; J14.1 53.71,43.97 ; J14.1 54.65,44.91 ; J7.1 173.29,179.29 ; J7.1 172.35,180.23 ; J7.1 171.41,179.29 ; J7.1 172.35,178.35 ; J23.1 184.63,53.71 ; J23.1 182.75,53.71 ; J23.1 183.69,54.65 ; J23.1 183.69,52.77 ; J6.1 87.04,198.01 ; J6.1 87.04,196.13 ; J6.1 86.1,197.07 ; J6.1 87.99,197.07 ; J20.1 174.89,184.63 ; J20.1 173.95,183.69 ; J20.1 174.89,182.75 ; J20.1 175.83,183.69 ; J3.1 198.01,141.56 ; J3.1 197.07,142.5 ; J3.1 196.13,141.56 ; J3.1 197.07,140.61 ; 204.69,95.58 J22.1 ; J22.1 203.75,96.52 ; J22.1 205.63,96.52 ; J22.1 204.69,97.46 ; 131.14,204.69 J11.1 ; J11.1 132.08,205.63 ; J11.1 132.08,203.75 ; J11.1 133.02,204.69 ; 96.52,22.97 J13.1 ; J13.1 96.52,24.85 ; J13.1 97.46,23.91 ; J13.1 95.58,23.91 ; 177.66,15.06 J26.1 ; J26.1 180.34,13.88 ; J26.1 183.02,15.06 ; J26.1 180.34,16.25 ; J12.1 44.91,175.83 ; J12.1 44.91,173.95 ; J12.1 43.97,174.89 ; J12.1 45.85,174.89 ; 144.1,26.19 J24.1 ; J24.1 144.1,28.07 ; J24.1 145.04,27.13 ; J24.1 143.15,27.13 ; 201.47,143.15 J21.1 ; J21.1 200.53,144.1 ; J21.1 202.41,144.1 ; J21.1 201.47,145.04 ; J1.1 57.19,49.31 ; J1.1 56.25,50.25 ; J1.1 55.31,49.31 ; J1.1 56.25,48.37 ; 30.59,87.04 J10.1 ; J10.1 32.47,87.04 ; J10.1 31.53,87.99 ; J10.1 31.53,86.1 ; J18.1 84.5,202.41 ; J18.1 83.56,201.47 ; J18.1 84.5,200.53 ; J18.1 85.45,201.47 ; J16.1 23.91,133.02 ; J16.1 23.91,131.14 ; J16.1 24.85,132.08 ; J16.1 22.97,132.08 ; 198.67,96.52 J9.1 ; J9.1 199.61,95.58 ; J9.1 200.55,96.52 ; J9.1 199.61,97.46
  vias: v1(178.54,18.14) v1(178.54,17.5) v1(178.54,16.87) v1(179.17,18.14) v1(179.17,17.5) v1(179.17,16.87) v1(179.81,18.14) v1(179.81,17.5) v1(179.81,16.87) v1(180.44,18.14) v1(180.44,17.5) v1(180.44,16.87) v1(181.08,18.14) v1(181.08,17.5) v1(181.08,16.87) v1(181.71,18.14) v1(181.71,17.5) v1(181.71,16.87) v1(189.94,37.97) v1(189.94,37.34) v1(189.94,36.7) v1(189.94,35.84) v1(189.94,35.2) v1(189.94,34.57) v1(189.92,33.58) v1(189.92,32.94) v1(189.92,32.31) v1(189.94,31.32) v1(189.94,30.68) v1(189.94,30.05) v1(190.58,37.97) v1(190.58,37.34) v1(190.58,36.7) v1(190.58,35.84) v1(190.58,35.2) v1(190.58,34.57) v1(190.55,33.58) v1(190.55,32.94) v1(190.55,32.31) v1(190.58,31.32) v1(190.58,30.68) v1(190.58,30.05) v1(191.21,37.97) v1(191.21,37.34) v1(191.21,36.7) v1(191.21,35.84) v1(191.21,35.2) v1(191.21,34.57) v1(191.19,33.58) v1(191.19,32.94) v1(191.19,32.31) v1(191.21,31.32) v1(191.21,30.68) v1(191.21,30.05) v1(191.85,37.97) v1(191.85,37.34) v1(191.85,36.7) v1(191.85,35.84) v1(191.85,35.2) v1(191.85,34.57) v1(191.82,33.58) v1(191.82,32.94) v1(191.82,32.31) v1(191.85,31.32) v1(191.85,30.68) v1(191.85,30.05) v1(192.48,37.97) v1(192.48,37.34) v1(192.48,36.7) v1(192.48,35.84) v1(192.48,35.2) v1(192.48,34.57) v1(192.46,33.58) v1(192.46,32.94) v1(192.46,32.31) v1(192.48,31.32) v1(192.48,30.68) v1(192.48,30.05) v1(193.12,37.97) v1(193.12,37.34) v1(193.12,36.7) v1(193.12,35.84) v1(193.12,35.2) v1(193.12,34.57) v1(193.09,33.58) v1(193.09,32.94) v1(193.09,32.31) v1(193.12,31.32) v1(193.12,30.68) v1(193.12,30.05)
GND: length 2526.8
  TOP w0.127: 215.9,213.18 M5.1 ; M5.1 215.9,218.62 ; M5.1 213.18,215.9 ; M5.1 218.62,215.9 ; J21.2 201.14,146.3 ; J21.2 200.2,145.35 ; J21.2 200.2,147.24 ; J21.2 199.26,146.3 ; C36.2 48.14,36.09 ; C36.2 47.41,35.2 ; C36.2 48.14,34.32 ; 23.91,128.6 J16.2 ; J16.2 22.97,129.54 ; J16.2 23.91,130.48 ; R14.1 68.29,19.2 ; R14.1 67.55,20.08 ; R14.1 67.55,18.32 ; 22.22,79.91 C21.2 ; C21.2 23.16,80.85 ; C21.2 23.16,78.97 ; C21.2 24.11,79.91 ; C33.2 11.64,43.43 ; C33.2 10.91,44.32 ; C33.2 10.18,43.43 ; 18.28,128.68 C12.2 ; C12.2 19.01,129.57 ; C12.2 17.55,129.57 ; C12.2 18.28,130.45 ; 79.14,205.69 79.51,205.06 ; 79.51,205.06 78.75,204.62 ; 79.51,205.06 79.88,204.42 ; 79.51,205.06 80.27,205.5 ; C4.2 178.92,190.74 ; C4.2 177.63,190.4 ; C4.2 179.26,189.45 ; C4.2 177.98,189.11 ; J24.2 147.24,28.4 ; J24.2 145.35,28.4 ; J24.2 146.3,29.34 ; J24.2 146.3,27.46 ; C43.2 170.22,18.69 ; C43.2 170.22,16.92 ; C43.2 170.95,17.81 ; U2.13 28.69,32.22 ; U2.13 27.73,31.92 ; U2.13 28.69,31.61 ; 93.87,2.07 U3.13 ; U3.13 93.87,2.68 ; U3.13 94.82,2.37 ; J26.3 185.04,14.75 ; J26.3 186.22,12.06 ; J26.3 185.04,9.38 ; J26.3 183.86,12.06 ; 38.44,31 U4.22 37.83,31 ; 87.31,3.03 U3.11 89.22,3.03 ; 62.54,3.03 U5.11 63.5,3.33 ; J1.2 59.39,48.04 ; J1.2 58.45,48.98 ; J1.2 57.51,48.04 ; 54.06,33.27 C35.2 52.59,33.27 ; 27.46,82.3 J15.2 ; J15.2 28.4,83.25 ; J15.2 28.4,81.36 ; 146.4,23.27 C17.2 ; C17.2 147.35,22.32 ; C17.2 148.29,23.27 ; C17.2 147.35,24.21 ; 46.68,26.55 U6.9 44.76,26.55 ; M9.1 114.3,186.87 ; M9.1 41.73,114.3 ; M9.1 114.3,41.73 ; M9.1 186.87,114.3 ; C28.2 35.53,36.43 ; C28.2 35.53,34.97 ; C28.2 36.42,35.7 ; 9.98,12.7 M4.1 ; M4.1 15.42,12.7 ; M4.1 12.7,9.98 ; M4.1 12.7,15.42 ; 93.87,7.92 U3.22 93.87,8.53 ; J7.2 171.09,180.56 ; J7.2 170.15,179.62 ; J7.2 169.21,180.56 ; 190.1,50.02 C13.2 ; C13.2 191.39,50.36 ; C13.2 191.73,49.07 ; C13.2 190.44,48.73 ; 177.66,9.07 J26.2 ; J26.2 183.02,9.07 ; J26.2 180.34,10.25 ; J26.2 180.34,7.88 ; 47.1,170.15 J17.2 ; J17.2 48.04,171.09 ; J17.2 48.04,169.21 ; J17.2 48.98,170.15 ; C10.2 210.58,99.87 ; C10.2 209.84,98.98 ; C10.2 211.31,98.98 ; C10.2 210.58,98.1 ; 171.75,184.96 J20.2 ; J20.2 172.69,185.9 ; J20.2 173.63,184.96 ; J20.2 172.69,184.02 ; 128.48,209.76 C5.2 ; C5.2 129.36,209.03 ; C5.2 129.36,210.49 ; C5.2 130.24,209.76 ; C29.2 90.23,12.24 ; C29.2 89.5,11.35 ; C29.2 90.23,10.47 ; 43.64,171.75 J12.2 ; J12.2 43.64,173.63 ; J12.2 42.7,172.69 ; 45.8,41.78 C15.2 ; C15.2 44.85,42.72 ; C15.2 45.8,43.67 ; C15.2 46.74,42.72 ; C40.2 181.7,31.16 ; C40.2 181.7,29.4 ; C40.2 182.43,30.28 ; C20.2 100.66,16.92 ; C20.2 99.72,17.86 ; C20.2 98.78,16.92 ; C20.2 99.72,15.97 ; 7.93,34.78 U1.11 ; U1.11 U1.12 ; U1.11 11.28,34.78 v1(11.43,34.92) ; U1.11 8.89,35.08 ; C11.2 16.97,133.05 ; C11.2 16.02,132.11 ; C11.2 17.91,132.11 ; C11.2 16.97,131.16 ; 43.52,22.03 C31.2 ; C31.2 44.25,22.91 ; C31.2 42.79,22.91 ; U4.11 43.33,26.36 ; U4.11 43.33,24.44 ; U4.11 43.03,25.4 ; C7.2 38.96,175.24 ; C7.2 38.77,176.37 ; C7.2 37.88,174.84 ; C7.2 37.69,175.97 ; J18.2 82.3,201.14 ; J18.2 81.36,200.2 ; J18.2 83.25,200.2 ; 190.7,12.06 L1.1 ; L1.1 191.71,13.83 ; L1.1 192.71,12.06 ; L1.1 191.71,10.3 ; C23.2 209.51,148.29 ; C23.2 208.22,148.63 ; C23.2 209.16,147 ; C23.2 207.88,147.35 ; 217.54,24.35 L2.2 215.77,25.35 ; 212.04,95.5 C9.2 ; C9.2 212.04,97.39 ; C9.2 211.1,96.44 ; C9.2 212.98,96.44 ; 179.58,27.33 C39.2 ; C39.2 180.52,28.27 ; C39.2 181.46,27.33 ; C34.2 19.24,43.96 ; C34.2 19.97,43.08 ; C34.2 18.51,43.08 ; U4.13 44.28,31 ; U4.13 43.98,31.96 ; U4.13 43.68,31 ; 62.81,21.46 Q1.3 ; Q1.3 63.5,20.67 ; Q1.3 63.5,22.25 ; 145.15,20.93 C18.2 ; C18.2 146.61,20.93 ; C18.2 145.88,21.81 ; C18.2 145.88,20.05 ; 31.68,33 C32.2 ; C32.2 30.95,33.88 ; C32.2 31.68,34.76 ; 180.52,35.41 C38.2 ; C38.2 181.46,36.35 ; C38.2 180.52,37.29 ; 88.27,2.07 U3.12 87.31,2.37 ; J2.2 181.5,58.45 ; J2.2 180.56,57.51 ; J2.2 180.56,59.39 ; J2.2 179.62,58.45 ; J5.2 28.99,130.48 ; J5.2 29.93,129.54 ; J5.2 28.99,128.6 ; C22.2 23.34,88.47 ; C22.2 23.34,87.01 ; C22.2 22.46,87.74 ; C22.2 24.22,87.74 ; C26.2 74.23,12.01 ; C26.2 74.96,11.13 ; C26.2 73.5,11.13 ; J6.2 85.79,195.8 ; J6.2 84.84,194.86 ; J6.2 84.84,196.74 ; J6.2 83.9,195.8 ; C24.2 207.01,149.71 ; C24.2 205.94,150.11 ; C24.2 205.75,148.98 ; C24.2 206.82,148.58 ; U6.7 46.68,27.85 ; U6.7 44.76,27.85 ; U6.7 45.72,28.16 ; C37.2 181.75,39.84 ; C37.2 182.48,38.96 ; C37.2 181.75,38.08 ; 35.25,31.26 U2.11 34.29,30.96 ; C42.2 168.91,22.15 ; C42.2 168.91,20.27 ; C42.2 169.85,21.21 ; 69.1,2.07 U5.13 ; U5.13 70.06,2.37 ; U5.13 69.1,2.68 ; 8.89,33.82 U1.12 ; U1.12 9.85,34.12 ; U1.12 7.93,34.12 ; M3.1 218.62,12.7 ; M3.1 215.9,9.98 ; M3.1 215.9,15.42 ; M3.1 213.18,12.7 ; 142.81,32.8 J8.2 ; J8.2 143.76,33.74 ; J8.2 144.7,32.8 ; 67.48,20.66 R18.1 ; R18.1 67.48,22.42 ; R18.1 68.21,21.54 ; 190.83,52.13 191.47,51.76 ; 190.83,52.13 190.2,52.49 ; 190.83,52.13 191.27,52.89 ; 190.83,52.13 190.39,51.36 ; 131.06,211.02 C2.2 ; C2.2 132.95,211.02 ; C2.2 132,210.08 ; C2.2 132,211.97 ; J11.2 130.48,204.69 ; J11.2 129.54,203.75 ; J11.2 129.54,205.63 ; J11.2 128.6,204.69 ; 184.96,54.97 J23.2 ; J23.2 184.96,56.85 ; J23.2 185.9,55.91 ; C19.2 99.17,19.74 ; C19.2 98.44,20.62 ; C19.2 97.7,19.74 ; C19.2 98.44,18.85 ; 129.54,198.67 J19.2 ; J19.2 128.6,199.61 ; J19.2 129.54,200.55 ; J19.2 130.48,199.61 ; 46.68,25.9 U6.10 44.76,25.9 ; 204.69,98.12 J22.2 ; J22.2 205.63,99.06 ; J22.2 204.69,100 ; 65.34,10.12 C25.2 ; C25.2 64.61,11 ; C25.2 65.34,11.88 ; 13.54,34.12 U1.13 ; U1.13 14.49,34.43 ; U1.13 14.49,33.77 v1(14.61,33.66) ; U1.13 15.45,34.12 ; 174.89,190.67 C3.2 ; C3.2 175.29,189.59 ; C3.2 176.02,190.86 ; C3.2 176.42,189.78 ; C41.2 182.48,32.69 ; C41.2 181.75,31.81 ; C41.2 181.75,33.57 ; 80.5,207 C1.2 ; C1.2 80.85,208.29 ; C1.2 81.79,206.66 ; C1.2 82.13,207.94 ; U6.13 51.32,24.9 ; U6.13 50.37,24.6 ; U6.13 52.28,24.6 ; 28.69,25.76 U2.22 28.69,26.37 ; J14.2 56.85,43.64 ; J14.2 55.91,44.58 ; J14.2 55.91,42.7 ; J14.2 54.97,43.64 ; 12.7,213.18 M6.1 ; M6.1 12.7,218.62 ; M6.1 9.98,215.9 ; M6.1 15.42,215.9 ; 69.1,8.53 U5.22 69.1,7.92 ; J10.2 32.8,85.79 ; J10.2 32.8,83.9 ; J10.2 33.74,84.84 ; J10.2 31.86,84.84 ; 35.25,31.92 U2.12 33.33,31.92 ; C30.2 95.84,12.29 ; C30.2 96.58,11.4 ; C30.2 95.11,11.4 ; U6.22 51.32,30.75 ; U6.22 50.37,30.45 ; U6.22 51.32,30.14 ; C16.2 45.81,47.39 ; C16.2 45.81,45.63 ; C16.2 45.08,46.51 ; C16.2 46.54,46.51 ; 46.68,25.25 U6.11 44.76,25.25 ; U7.6 201.47,30.56 ; U7.6 201.47,19.53 ; U7.6 206.1,25.04 ; 30.72,22.66 C27.2 ; C27.2 29.99,23.55 ; C27.2 30.72,24.43 ; C27.2 31.45,23.55 ; 195.8,142.81 J3.2 ; J3.2 194.86,143.76 ; J3.2 195.8,144.7 ; J9.2 199.61,100 ; J9.2 198.67,99.06 ; J9.2 199.61,98.12 ; 44.76,27.2 U6.8 46.68,27.2 ; 98.12,28.99 J4.2 ; J4.2 99.06,29.93 ; J4.2 100,28.99 ; 63.5,2.07 U5.12 ; U5.12 62.54,2.37 ; U5.12 64.46,2.37 ; 63.5,15.59 Q3.3 ; Q3.3 63.5,17.17 ; Q3.3 62.81,16.38 ; J13.2 100,23.91 ; J13.2 98.12,23.91 ; J13.2 99.06,22.97 ; C8.2 39.12,179.29 ; C8.2 38.18,177.66 ; C8.2 39.47,178 ; C8.2 37.84,178.95 ; 170.27,23.78 C44.2 ; C44.2 171,24.66 ; C44.2 170.27,25.54 ; 45.72,24.3 U6.12 44.76,24.6 ; 191.57,24.31 U7.3 190.24,25.02 ; U1.22 v1(13.37,39.97)
  TOP w0.203: J7.2 170.15,182.42 J20.2 ; J17.2 45.5,172.69 J12.2 ; R14.1 v1(66.31,19.2) ; C33.2 10.91,42.5 10.9,42.49 10.9,40.79 11.71,39.97 v1(13.37,39.97) ; J10.2 30.26,82.3 J15.2 ; Q1.3 v1(64.74,21.46) ; J21.2 197.66,143.76 J3.2 ; v1(43.81,29.21) 43.98,29.38 U4.13 ; v1(67.34,8.22) 67.34,3.1 67.31,3.07 v1(67.31,2.54) 67.48,2.37 U5.13 ; v1(67.34,8.22) 67.34,10.13 66.47,11 C25.2 ; v1(67.34,8.22) U5.22 69.75,8.22 70.34,8.81 73.47,8.81 74.23,9.58 C26.2 ; v1(65.41,3.17) 65.26,3.03 U5.11 ; U4.12 43.98,24.75 43.52,24.29 C31.2 ; U4.12 43.98,26.5 v1(43.81,26.67) ; U4.12 U4.11 ; C28.2 34.6,35.7 34.29,35.38 34.29,33.15 ; J23.2 183.1,55.91 J2.2 ; R18.1 v1(66.23,21.54) ; C27.2 30.71,23.56 30.71,25.69 v1(31.08,26.07) U2.22 ; J6.2 82.3,198.34 J18.2 ; v1(187.32,12.06) v1(187.32,12.7) ; U6.22 v1(52.67,30.45) 53.32,31.1 C35.2 53.32,34.27 53.33,34.28 53.33,34.5 52.63,35.2 C36.2 ; v1(92.27,8.22) 92.27,2.38 92.28,2.37 ; v1(92.27,8.22) U3.22 95.5,8.22 95.84,8.57 C30.2 ; v1(92.27,8.22) 92.27,10.65 91.57,11.35 C29.2 ; 93.06,188.85 93.06,188.86 ; Q3.3 v1(64.74,16.38) ; U6.7 U6.8 U6.9 U6.10 U6.11 U6.12 v1(46.82,24.6) ; U4.22 v1(38.13,29.88) ; U2.13 31.88,31.92 v1(32.53,31.26) U2.11 U2.12 34.29,33.15 ; 34.29,33.15 33.55,33.88 C32.2 ; U6.13 v1(51.32,24.24) ; C34.2 19.24,42.93 16.28,39.97 U1.22 ; J9.2 J22.2 ; J16.2 J5.2
  TOP w0.381: U5.12 U5.11 ; U3.11 U3.12 v1(90.17,2.37) U3.13 ; J8.2 143.76,30.94 J24.2 ; J4.2 J13.2 ; J14.2 58.45,46.18 J1.2
  TOP w0.635: C38.2 v1(179.05,36.35) ; C44.2 v1(168.38,24.66) ; C42.2 v1(167.56,21.21) ; U7.3 196.56,25.02 196.58,25.04 U7.6 ; C37.2 v1(180.29,38.96) ; C39.2 v1(180.52,25.93) ; C41.2 v1(180.24,32.69) ; C43.2 v1(168.68,17.81) ; C40.2 v1(180.24,30.28)
  TOP w2.54: U7.6 202.17,24.35 L2.2 215.77,12.83 M3.1
  LAYER 1 w0.127: 184.96,54.97 J23.2 ; J23.2 184.02,55.91 ; J23.2 185.9,55.91 ; J23.2 184.96,56.85 ; M6.1 12.7,218.62 ; M6.1 15.42,215.9 ; M6.1 12.7,213.18 ; M6.1 9.98,215.9 ; J16.2 23.91,130.48 ; J16.2 23.91,128.6 ; J16.2 24.85,129.54 ; J16.2 22.97,129.54 ; M5.1 215.9,218.62 ; M5.1 218.62,215.9 ; M5.1 215.9,213.18 ; M5.1 213.18,215.9 ; 43.64,171.75 J12.2 ; J12.2 43.64,173.63 ; J12.2 44.58,172.69 ; J12.2 42.7,172.69 ; 98.12,23.91 J13.2 ; J13.2 99.06,24.85 ; J13.2 100,23.91 ; J13.2 99.06,22.97 ; 215.9,9.98 M3.1 ; M3.1 215.9,15.42 ; M3.1 213.18,12.7 ; M3.1 218.62,12.7 ; J17.2 48.04,171.09 ; J17.2 47.1,170.15 ; J17.2 48.04,169.21 ; J17.2 48.98,170.15 ; J21.2 201.14,146.3 ; J21.2 199.26,146.3 ; J21.2 200.2,145.35 ; J21.2 200.2,147.24 ; 31.86,84.84 J10.2 ; J10.2 32.8,83.9 ; J10.2 32.8,85.79 ; J10.2 33.74,84.84 ; 171.75,184.96 J20.2 ; J20.2 173.63,184.96 ; J20.2 172.69,184.02 ; J20.2 172.69,185.9 ; J18.2 83.25,200.2 ; J18.2 81.36,200.2 ; J18.2 82.3,199.26 ; J18.2 82.3,201.14 ; 128.6,199.61 J19.2 ; J19.2 129.54,200.55 ; J19.2 129.54,198.67 ; J19.2 130.48,199.61 ; 98.12,28.99 J4.2 ; J4.2 99.06,29.93 ; J4.2 99.06,28.05 ; J4.2 100,28.99 ; 194.86,143.76 J3.2 ; J3.2 196.74,143.76 ; J3.2 195.8,144.7 ; J3.2 195.8,142.81 ; 143.76,31.86 J8.2 ; J8.2 142.81,32.8 ; J8.2 144.7,32.8 ; J8.2 143.76,33.74 ; 55.91,42.7 J14.2 ; J14.2 54.97,43.64 ; J14.2 55.91,44.58 ; J14.2 56.85,43.64 ; 83.9,195.8 J6.2 ; J6.2 84.84,194.86 ; J6.2 84.84,196.74 ; J6.2 85.79,195.8 ; J26.3 185.04,14.75 ; J26.3 183.86,12.06 ; J26.3 186.22,12.06 ; J26.3 185.04,9.38 ; 179.62,58.45 J2.2 ; J2.2 181.5,58.45 ; J2.2 180.56,57.51 ; J2.2 180.56,59.39 ; 177.66,9.07 J26.2 ; J26.2 180.34,10.25 ; J26.2 180.34,7.88 ; J26.2 183.02,9.07 ; 28.99,128.6 J5.2 ; J5.2 28.05,129.54 ; J5.2 28.99,130.48 ; J5.2 29.93,129.54 ; J11.2 129.54,205.63 ; J11.2 129.54,203.75 ; J11.2 130.48,204.69 ; J11.2 128.6,204.69 ; 9.98,12.7 M4.1 ; M4.1 12.7,9.98 ; M4.1 12.7,15.42 ; M4.1 15.42,12.7 ; 41.73,114.3 M9.1 ; M9.1 114.3,41.73 ; M9.1 186.87,114.3 ; M9.1 114.3,186.87 ; J24.2 146.3,29.34 ; J24.2 147.24,28.4 ; J24.2 145.35,28.4 ; J24.2 146.3,27.46 ; 203.75,99.06 J22.2 ; J22.2 204.69,100 ; J22.2 204.69,98.12 ; J22.2 205.63,99.06 ; 58.45,47.1 J1.2 ; J1.2 58.45,48.98 ; J1.2 57.51,48.04 ; J1.2 59.39,48.04 ; 170.15,179.62 J7.2 ; J7.2 171.09,180.56 ; J7.2 170.15,181.5 ; J7.2 169.21,180.56 ; J15.2 29.34,82.3 ; J15.2 28.4,81.36 ; J15.2 28.4,83.25 ; J15.2 27.46,82.3 ; 198.67,99.06 J9.2 ; J9.2 200.55,99.06 ; J9.2 199.61,100 ; J9.2 199.61,98.12
  GND2 w0.127: M3.1 218.62,12.7 ; M3.1 215.9,15.42 ; M3.1 215.9,9.98 ; M3.1 213.18,12.7 ; 195.8,142.81 J3.2 ; J3.2 196.74,143.76 ; J3.2 195.8,144.7 ; J3.2 194.86,143.76 ; 12.7,9.98 M4.1 ; M4.1 12.7,15.42 ; M4.1 15.42,12.7 ; M4.1 9.98,12.7 ; J14.2 55.91,44.58 ; J14.2 55.91,42.7 ; J14.2 54.97,43.64 ; J14.2 56.85,43.64 ; 48.04,169.21 J17.2 ; J17.2 47.1,170.15 ; J17.2 48.04,171.09 ; J17.2 48.98,170.15 ; J20.2 173.63,184.96 ; J20.2 172.69,185.9 ; J20.2 171.75,184.96 ; J20.2 172.69,184.02 ; J23.2 184.96,56.85 ; J23.2 184.96,54.97 ; J23.2 184.02,55.91 ; J23.2 185.9,55.91 ; J18.2 83.25,200.2 ; J18.2 82.3,201.14 ; J18.2 81.36,200.2 ; J18.2 82.3,199.26 ; J12.2 44.58,172.69 ; J12.2 42.7,172.69 ; J12.2 43.64,171.75 ; J12.2 43.64,173.63 ; J16.2 23.91,130.48 ; J16.2 24.85,129.54 ; J16.2 23.91,128.6 ; J16.2 22.97,129.54 ; J15.2 28.4,83.25 ; J15.2 29.34,82.3 ; J15.2 27.46,82.3 ; J15.2 28.4,81.36 ; J11.2 129.54,205.63 ; J11.2 130.48,204.69 ; J11.2 129.54,203.75 ; J11.2 128.6,204.69 ; J2.2 181.5,58.45 ; J2.2 179.62,58.45 ; J2.2 180.56,59.39 ; J2.2 180.56,57.51 ; J22.2 205.63,99.06 ; J22.2 204.69,100 ; J22.2 204.69,98.12 ; J22.2 203.75,99.06 ; J24.2 147.24,28.4 ; J24.2 146.3,27.46 ; J24.2 145.35,28.4 ; J24.2 146.3,29.34 ; J4.2 99.06,29.93 ; J4.2 99.06,28.05 ; J4.2 98.12,28.99 ; J4.2 100,28.99 ; 32.8,83.9 J10.2 ; J10.2 33.74,84.84 ; J10.2 32.8,85.79 ; J10.2 31.86,84.84 ; J19.2 129.54,200.55 ; J19.2 128.6,199.61 ; J19.2 130.48,199.61 ; J19.2 129.54,198.67 ; 213.18,215.9 M5.1 ; M5.1 218.62,215.9 ; M5.1 215.9,213.18 ; M5.1 215.9,218.62 ; J9.2 199.61,100 ; J9.2 200.55,99.06 ; J9.2 199.61,98.12 ; J9.2 198.67,99.06 ; J21.2 201.14,146.3 ; J21.2 200.2,147.24 ; J21.2 199.26,146.3 ; J21.2 200.2,145.35 ; 12.7,213.18 M6.1 ; M6.1 12.7,218.62 ; M6.1 15.42,215.9 ; M6.1 9.98,215.9 ; J6.2 84.84,196.74 ; J6.2 85.79,195.8 ; J6.2 84.84,194.86 ; J6.2 83.9,195.8 ; J1.2 59.39,48.04 ; J1.2 57.51,48.04 ; J1.2 58.45,48.98 ; J1.2 58.45,47.1 ; 98.12,23.91 J13.2 ; J13.2 99.06,24.85 ; J13.2 100,23.91 ; J13.2 99.06,22.97 ; 142.81,32.8 J8.2 ; J8.2 144.7,32.8 ; J8.2 143.76,33.74 ; J8.2 143.76,31.86 ; J5.2 29.93,129.54 ; J5.2 28.05,129.54 ; J5.2 28.99,130.48 ; J5.2 28.99,128.6 ; 169.21,180.56 J7.2 ; J7.2 171.09,180.56 ; J7.2 170.15,179.62 ; J7.2 170.15,181.5 ; M9.1 186.87,114.3 ; M9.1 41.73,114.3 ; M9.1 114.3,186.87 ; M9.1 114.3,41.73
  LAYER 2 w0.127: J7.2 171.09,180.56 ; J7.2 169.21,180.56 ; J7.2 170.15,179.62 ; J7.2 170.15,181.5 ; M3.1 218.62,12.7 ; M3.1 213.18,12.7 ; M3.1 215.9,9.98 ; M3.1 215.9,15.42 ; 195.8,142.81 J3.2 ; J3.2 196.74,143.76 ; J3.2 194.86,143.76 ; J3.2 195.8,144.7 ; 54.97,43.64 J14.2 ; J14.2 55.91,44.58 ; J14.2 56.85,43.64 ; J14.2 55.91,42.7 ; 198.67,99.06 J9.2 ; J9.2 199.61,98.12 ; J9.2 199.61,100 ; J9.2 200.55,99.06 ; 129.54,198.67 J19.2 ; J19.2 129.54,200.55 ; J19.2 130.48,199.61 ; J19.2 128.6,199.61 ; 204.69,98.12 J22.2 ; J22.2 204.69,100 ; J22.2 205.63,99.06 ; J22.2 203.75,99.06 ; 84.84,194.86 J6.2 ; J6.2 83.9,195.8 ; J6.2 85.79,195.8 ; J6.2 84.84,196.74 ; 215.9,213.18 M5.1 ; M5.1 218.62,215.9 ; M5.1 215.9,218.62 ; M5.1 213.18,215.9 ; 171.75,184.96 J20.2 ; J20.2 172.69,184.02 ; J20.2 173.63,184.96 ; J20.2 172.69,185.9 ; 27.46,82.3 J15.2 ; J15.2 28.4,81.36 ; J15.2 29.34,82.3 ; J15.2 28.4,83.25 ; 184.96,54.97 J23.2 ; J23.2 185.9,55.91 ; J23.2 184.96,56.85 ; J23.2 184.02,55.91 ; 48.04,169.21 J17.2 ; J17.2 48.04,171.09 ; J17.2 47.1,170.15 ; J17.2 48.98,170.15 ; J2.2 180.56,59.39 ; J2.2 181.5,58.45 ; J2.2 179.62,58.45 ; J2.2 180.56,57.51 ; J26.3 186.22,12.06 ; J26.3 185.04,14.75 ; J26.3 183.86,12.06 ; J26.3 185.04,9.38 ; J11.2 129.54,205.63 ; J11.2 129.54,203.75 ; J11.2 128.6,204.69 ; J11.2 130.48,204.69 ; J10.2 32.8,85.79 ; J10.2 33.74,84.84 ; J10.2 31.86,84.84 ; J10.2 32.8,83.9 ; 81.36,200.2 J18.2 ; J18.2 82.3,199.26 ; J18.2 83.25,200.2 ; J18.2 82.3,201.14 ; 99.06,28.05 J4.2 ; J4.2 98.12,28.99 ; J4.2 100,28.99 ; J4.2 99.06,29.93 ; M4.1 12.7,15.42 ; M4.1 9.98,12.7 ; M4.1 12.7,9.98 ; M4.1 15.42,12.7 ; J26.2 183.02,9.07 ; J26.2 180.34,10.25 ; J26.2 177.66,9.07 ; J26.2 180.34,7.88 ; J21.2 201.14,146.3 ; J21.2 200.2,147.24 ; J21.2 200.2,145.35 ; J21.2 199.26,146.3 ; 41.73,114.3 M9.1 ; M9.1 114.3,186.87 ; M9.1 186.87,114.3 ; J1.2 58.45,48.98 ; J1.2 58.45,47.1 ; J1.2 57.51,48.04 ; J1.2 59.39,48.04 ; J24.2 146.3,29.34 ; J24.2 146.3,27.46 ; J24.2 145.35,28.4 ; J24.2 147.24,28.4 ; J16.2 23.91,130.48 ; J16.2 22.97,129.54 ; J16.2 23.91,128.6 ; J16.2 24.85,129.54 ; J8.2 144.7,32.8 ; J8.2 143.76,31.86 ; J8.2 143.76,33.74 ; J8.2 142.81,32.8 ; 43.64,171.75 J12.2 ; J12.2 44.58,172.69 ; J12.2 42.7,172.69 ; J12.2 43.64,173.63 ; 28.05,129.54 J5.2 ; J5.2 29.93,129.54 ; J5.2 28.99,128.6 ; J5.2 28.99,130.48 ; M6.1 12.7,218.62 ; M6.1 9.98,215.9 ; M6.1 12.7,213.18 ; M6.1 15.42,215.9 ; J13.2 99.06,24.85 ; J13.2 100,23.91 ; J13.2 99.06,22.97 ; J13.2 98.12,23.91
  BOTTOM w0.127: M6.1 15.42,215.9 ; M6.1 12.7,218.62 ; M6.1 9.98,215.9 ; M6.1 12.7,213.18 ; J6.2 85.79,195.8 ; J6.2 83.9,195.8 ; J6.2 84.84,194.86 ; J6.2 84.84,196.74 ; J9.2 200.55,99.06 ; J9.2 198.67,99.06 ; J9.2 199.61,100 ; J9.2 199.61,98.12 ; J1.2 58.45,48.98 ; J1.2 57.51,48.04 ; J1.2 58.45,47.1 ; J1.2 59.39,48.04 ; 179.62,58.45 J2.2 ; J2.2 180.56,59.39 ; J2.2 181.5,58.45 ; J2.2 180.56,57.51 ; J14.2 55.91,44.58 ; J14.2 55.91,42.7 ; J14.2 54.97,43.64 ; J14.2 56.85,43.64 ; 28.05,129.54 J5.2 ; J5.2 28.99,128.6 ; J5.2 29.93,129.54 ; J5.2 28.99,130.48 ; J22.2 204.69,100 ; J22.2 203.75,99.06 ; J22.2 205.63,99.06 ; J22.2 204.69,98.12 ; J3.2 195.8,144.7 ; J3.2 194.86,143.76 ; J3.2 196.74,143.76 ; J3.2 195.8,142.81 ; J26.3 185.04,14.75 ; J26.3 183.86,12.06 ; J26.3 186.22,12.06 ; J26.3 185.04,9.38 ; J24.2 146.3,29.34 ; J24.2 147.24,28.4 ; J24.2 145.35,28.4 ; J24.2 146.3,27.46 ; M5.1 215.9,218.62 ; M5.1 213.18,215.9 ; M5.1 215.9,213.18 ; M5.1 218.62,215.9 ; J21.2 200.2,147.24 ; J21.2 201.14,146.3 ; J21.2 200.2,145.35 ; J21.2 199.26,146.3 ; J20.2 172.69,185.9 ; J20.2 172.69,184.02 ; J20.2 171.75,184.96 ; J20.2 173.63,184.96 ; J13.2 100,23.91 ; J13.2 99.06,24.85 ; J13.2 99.06,22.97 ; J13.2 98.12,23.91 ; 215.9,9.98 M3.1 ; M3.1 213.18,12.7 ; M3.1 218.62,12.7 ; M3.1 215.9,15.42 ; J16.2 23.91,130.48 ; J16.2 23.91,128.6 ; J16.2 22.97,129.54 ; J16.2 24.85,129.54 ; 184.02,55.91 J23.2 ; J23.2 184.96,54.97 ; J23.2 185.9,55.91 ; J23.2 184.96,56.85 ; J15.2 28.4,83.25 ; J15.2 28.4,81.36 ; J15.2 29.34,82.3 ; J15.2 27.46,82.3 ; 170.15,179.62 J7.2 ; J7.2 171.09,180.56 ; J7.2 169.21,180.56 ; J7.2 170.15,181.5 ; M4.1 12.7,15.42 ; M4.1 15.42,12.7 ; M4.1 12.7,9.98 ; M4.1 9.98,12.7 ; J12.2 43.64,173.63 ; J12.2 43.64,171.75 ; J12.2 42.7,172.69 ; J12.2 44.58,172.69 ; 177.66,9.07 J26.2 ; J26.2 180.34,10.25 ; J26.2 180.34,7.88 ; J26.2 183.02,9.07 ; J4.2 99.06,29.93 ; J4.2 100,28.99 ; J4.2 99.06,28.05 ; J4.2 98.12,28.99 ; J17.2 48.98,170.15 ; J17.2 48.04,169.21 ; J17.2 47.1,170.15 ; J17.2 48.04,171.09 ; M9.1 186.87,114.3 ; M9.1 114.3,41.73 ; M9.1 114.3,186.87 ; M9.1 41.73,114.3 ; 82.3,199.26 J18.2 ; J18.2 81.36,200.2 ; J18.2 82.3,201.14 ; J18.2 83.25,200.2 ; J10.2 33.74,84.84 ; J10.2 32.8,85.79 ; J10.2 32.8,83.9 ; J10.2 31.86,84.84 ; J8.2 143.76,33.74 ; J8.2 142.81,32.8 ; J8.2 143.76,31.86 ; J8.2 144.7,32.8 ; 129.54,203.75 J11.2 ; J11.2 129.54,205.63 ; J11.2 128.6,204.69 ; J11.2 130.48,204.69 ; J19.2 130.48,199.61 ; J19.2 129.54,198.67 ; J19.2 129.54,200.55 ; J19.2 128.6,199.61
  vias: v1(5.72,34.29) v1(5.72,31.75) v1(5.72,29.21) v1(5.72,26.67) v1(5.72,24.13) v1(5.72,21.59) v1(5.72,19.05) v1(7.62,208.28) v1(7.62,205.74) v1(7.62,203.2) v1(7.62,200.66) v1(7.62,198.12) v1(7.62,195.58) v1(7.62,193.04) v1(7.62,190.5) v1(7.62,187.96) v1(7.62,185.42) v1(7.62,182.88) v1(7.62,180.34) v1(7.62,177.8) v1(7.62,175.26) v1(7.62,172.72) v1(7.62,170.18) v1(7.62,167.64) v1(7.62,165.1) v1(7.62,162.56) v1(7.62,160.02) v1(7.62,157.48) v1(7.62,154.94) v1(7.62,152.4) v1(7.62,149.86) v1(7.62,147.32) v1(7.62,144.78) v1(7.62,142.24) v1(7.62,139.7) v1(7.62,137.16) v1(7.62,134.62) v1(7.62,132.08) v1(7.62,129.54) v1(7.62,127) v1(7.62,124.46) v1(7.62,121.92) v1(7.62,119.38) v1(7.62,116.84) v1(7.62,114.3) v1(7.62,111.76) v1(7.62,109.22) v1(7.62,106.68) v1(7.62,104.14) v1(7.62,101.6) v1(7.62,99.06) v1(7.62,96.52) v1(7.62,93.98) v1(7.62,91.44) v1(7.62,88.9) v1(7.62,86.36) v1(7.62,83.82) v1(7.62,81.28) v1(7.62,78.74) v1(7.62,76.2) v1(7.62,73.66) v1(7.62,71.12) v1(7.62,68.58) v1(7.62,66.04) v1(7.62,63.5) v1(7.62,60.96) v1(7.62,58.42) v1(7.62,55.88) v1(7.62,53.34) v1(7.62,50.8) v1(7.62,48.26) v1(7.62,45.72) v1(9.52,167.64) v1(9.52,165.1) v1(9.52,162.56) v1(9.52,160.02) v1(9.52,157.48) v1(9.52,154.94) v1(9.52,152.4) v1(9.52,149.86) v1(9.52,147.32) v1(9.52,144.78) v1(9.52,142.24) v1(9.52,139.7) v1(9.52,137.16) v1(9.52,134.62) v1(9.52,132.08) v1(9.52,129.54) v1(9.52,127) v1(9.52,124.46) v1(9.52,121.92) v1(9.52,119.38) v1(9.52,116.84) v1(9.52,114.3) v1(9.52,111.76) v1(9.52,109.22) v1(9.52,106.68) v1(9.52,104.14) v1(9.52,101.6) v1(9.52,99.06) v1(9.52,96.52) v1(9.52,93.98) v1(9.52,91.44) v1(9.52,88.9) v1(9.52,86.36) v1(9.52,83.82) v1(9.52,81.28) v1(9.52,78.74) v1(9.52,76.2) v1(9.52,73.66) v1(9.52,71.12) v1(9.52,68.58) v1(9.52,66.04) v1(9.52,63.5) v1(9.52,60.96) v1(9.52,58.42) v1(10.8,2.54) v1(11.43,165.1) v1(11.43,162.56) v1(11.43,160.02) v1(11.43,157.48) v1(11.43,154.94) v1(11.43,152.4) v1(11.43,149.86) v1(11.43,147.32) v1(11.43,144.78) v1(11.43,142.24) v1(11.43,139.7) v1(11.43,137.16) v1(11.43,134.62) v1(11.43,132.08) v1(11.43,129.54) v1(11.43,127) v1(11.43,124.46) v1(11.43,121.92) v1(11.43,119.38) v1(11.43,116.84) v1(11.43,114.3) v1(11.43,111.76) v1(11.43,109.22) v1(11.43,106.68) v1(11.43,104.14) v1(11.43,101.6) v1(11.43,99.06) v1(11.43,96.52) v1(11.43,93.98) v1(11.43,91.44) v1(11.43,88.9) v1(11.43,86.36) v1(11.43,83.82) v1(11.43,81.28) v1(11.43,78.74) v1(11.43,76.2) v1(11.43,73.66) v1(11.43,71.12) v1(11.43,68.58) v1(11.43,66.04) v1(11.43,63.5) v1(11.43,60.96) v1(11.43,6.35) v1(11.76,178.76) v1(11.76,174.32) v1(12.06,202.56) v1(12.06,200.02) v1(12.06,197.49) v1(12.06,194.94) v1(12.06,192.41) v1(12.06,189.87) v1(12.06,187.32) v1(13.33,2.54) v1(13.55,180.56) v1(13.55,176.11) v1(13.97,202.56) v1(13.97,200.02) v1(13.97,197.49) v1(13.97,194.94) v1(13.97,192.41) v1(13.97,189.87) v1(13.97,187.32) v1(13.97,165.1) v1(13.97,162.56) v1(13.97,160.02) v1(13.97,157.48) v1(13.97,154.94) v1(13.97,152.4) v1(13.97,149.86) v1(13.97,147.32) v1(13.97,144.78) v1(13.97,142.24) v1(13.97,139.7) v1(13.97,137.16) v1(13.97,134.62) v1(13.97,132.08) v1(13.97,129.54) v1(13.97,127) v1(13.97,124.46) v1(13.97,121.92) v1(13.97,119.38) v1(13.97,116.84) v1(13.97,114.3) v1(13.97,111.76) v1(13.97,109.22) v1(13.97,106.68) v1(13.97,104.14) v1(13.97,101.6) v1(13.97,99.06) v1(13.97,96.52) v1(13.97,93.98) v1(13.97,91.44) v1(13.97,88.9) v1(13.97,86.36) v1(13.97,83.82) v1(13.97,81.28) v1(13.97,78.74) v1(13.97,76.2) v1(13.97,73.66) v1(13.97,71.12) v1(13.97,68.58) v1(13.97,66.04) v1(13.97,63.5) v1(13.97,60.96) v1(13.97,6.35) v1(14.93,174.32) v1(15.35,182.35) v1(15.35,177.91) v1(15.88,2.54) v1(16.51,6.35) v1(16.73,176.11) v1(17.14,184.15) v1(17.14,179.7) v1(17.14,92.71) v1(17.14,90.17) v1(17.14,87.63) v1(17.14,85.09) v1(17.14,82.55) v1(17.14,80.01) v1(17.14,77.47) v1(17.14,74.93) v1(17.14,72.39) v1(17.14,69.85) v1(17.14,67.31) v1(17.14,64.77) v1(17.14,62.23) v1(17.14,59.69) v1(17.47,172.41) v1(17.78,142.88) v1(17.78,140.34) v1(17.78,137.79) v1(17.78,135.25) v1(18.41,166.37) v1(18.41,163.83) v1(18.41,161.29) v1(18.41,158.75) v1(18.41,156.21) v1(18.41,153.67) v1(18.41,151.13) v1(18.41,2.54) v1(18.52,177.91) v1(19.05,142.88) v1(19.05,140.34) v1(19.05,137.79) v1(19.05,135.25) v1(19.05,6.35) v1(19.27,174.21) v1(19.69,16.51) v1(19.69,13.97) v1(19.69,11.43) v1(19.69,8.89) v1(20.32,179.7) v1(20.32,166.37) v1(20.32,163.83) v1(20.32,161.29) v1(20.32,158.75) v1(20.32,156.21) v1(20.32,153.67) v1(20.32,151.13) v1(20.32,142.88) v1(20.32,140.34) v1(20.32,137.79) v1(20.32,135.25) v1(20.32,92.71) v1(20.32,90.17) v1(20.32,87.63) v1(20.32,85.09) v1(20.32,82.55) v1(20.32,80.01) v1(20.32,77.47) v1(20.32,74.93) v1(20.32,72.39) v1(20.32,69.85) v1(20.32,67.31) v1(20.32,64.77) v1(20.32,62.23) v1(20.32,59.69) v1(21.06,176) v1(22.86,177.8) v1(23.49,166.37) v1(23.49,163.83) v1(23.49,161.29) v1(23.49,158.75) v1(23.49,156.21) v1(23.49,153.67) v1(23.49,151.13) v1(23.49,142.88) v1(23.49,140.34) v1(23.49,137.79) v1(23.49,135.25) v1(26.03,180.97) v1(26.03,176.53) v1(26.03,174.62) v1(26.03,172.72) v1(26.03,170.18) v1(26.03,52.07) v1(26.03,49.53) v1(26.03,46.99) v1(26.03,44.45) v1(27.3,161.29) v1(27.3,158.75) v1(27.3,156.21) v1(27.3,153.67) v1(27.94,218.44) v1(27.94,215.9) v1(27.94,213.36) v1(27.94,210.82) v1(27.94,208.28) v1(27.94,205.74) v1(27.94,203.2) v1(27.94,52.07) v1(27.94,49.53) v1(27.94,46.99) v1(27.94,44.45) v1(28.58,180.97) v1(28.58,176.53) v1(28.58,174.62) v1(28.58,172.72) v1(28.58,170.18) v1(29.84,52.07) v1(29.84,49.53) v1(29.84,46.99) v1(29.84,44.45) v1(30.48,218.44) v1(30.48,215.9) v1(30.48,213.36) v1(30.48,210.82) v1(30.48,208.28) v1(30.48,205.74) v1(30.48,203.2) v1(31.11,180.97) v1(31.11,176.53) v1(31.11,174.62) v1(31.11,172.72) v1(31.11,170.18) v1(31.75,198.75) v1(31.75,196.22) v1(31.75,193.68) v1(31.75,191.13) v1(31.75,188.59) v1(31.75,186.06) v1(31.75,183.51) v1(31.75,64.13) v1(31.75,61.59) v1(31.75,59.05) v1(31.75,56.52) v1(31.75,52.07) v1(31.75,49.53) v1(31.75,46.99) v1(31.75,44.45) v1(33.02,218.44) v1(33.02,215.9) v1(33.02,213.36) v1(33.02,210.82) v1(33.02,208.28) v1(33.02,205.74) v1(33.02,203.2) v1(33.02,69.22) v1(33.02,66.67) v1(33.02,64.13) v1(33.02,61.59) v1(33.66,180.97) v1(33.66,176.53) v1(33.66,174.62) v1(33.66,172.72) v1(33.66,170.18) v1(34.29,198.75) v1(34.29,196.22) v1(34.29,193.68) v1(34.29,191.13) v1(34.29,188.59) v1(34.29,186.06) v1(34.29,183.51) v1(34.29,69.22) v1(34.29,66.67) v1(34.29,64.13) v1(34.29,61.59) v1(35.56,218.44) v1(35.56,215.9) v1(35.56,213.36) v1(35.56,210.82) v1(35.56,208.28) v1(35.56,205.74) v1(35.56,203.2) v1(35.56,64.13) v1(35.56,61.59) v1(35.56,59.05) v1(35.56,56.52) v1(36.83,198.75) v1(36.83,196.22) v1(36.83,193.68) v1(36.83,191.13) v1(36.83,188.59) v1(36.83,186.06) v1(36.83,183.51) v1(38.1,218.44) v1(38.1,215.9) v1(38.1,213.36) v1(38.1,210.82) v1(38.1,208.28) v1(38.1,205.74) v1(38.1,203.2) v1(40.64,218.44) v1(40.64,215.9) v1(40.64,213.36) v1(40.64,210.82) v1(40.64,208.28) v1(40.64,205.74) v1(40.64,203.2) v1(43.18,218.44) v1(43.18,215.9) v1(43.18,213.36) v1(43.18,210.82) v1(43.18,208.28) v1(43.18,205.74) v1(43.18,203.2) v1(43.18,198.75) v1(43.18,196.22) v1(43.18,193.68) v1(43.18,191.13) v1(43.18,188.59) v1(43.18,186.06) v1(43.18,183.51) v1(45.72,218.44) v1(45.72,215.9) v1(45.72,213.36) v1(45.72,210.82) v1(45.72,208.28) v1(45.72,205.74) v1(45.72,203.2) v1(45.72,198.75) v1(45.72,196.22) v1(45.72,193.68) v1(45.72,191.13) v1(45.72,188.59) v1(45.72,186.06) v1(45.72,183.51) v1(48.26,218.44) v1(48.26,215.9) v1(48.26,213.36) v1(48.26,210.82) v1(48.26,208.28) v1(48.26,205.74) v1(48.26,203.2) v1(48.26,198.75) v1(48.26,196.22) v1(48.26,193.68) v1(48.26,191.13) v1(48.26,188.59) v1(48.26,186.06) v1(48.26,183.51) v1(52.7,222.25) v1(52.7,219.71) v1(52.7,217.17) v1(52.7,214.63) v1(52.7,212.09) v1(52.7,209.55) v1(52.7,207.01) v1(56.52,222.25) v1(56.52,219.71) v1(56.52,217.17) v1(56.52,214.63) v1(56.52,212.09) v1(56.52,209.55) v1(56.52,207.01) v1(57.15,18.41) v1(57.15,15.88) v1(57.15,13.33) v1(57.15,10.8) v1(59.05,222.25) v1(59.05,219.71) v1(59.05,217.17) v1(59.05,214.63) v1(59.05,212.09) v1(59.05,209.55) v1(59.05,207.01) v1(59.05,18.41) v1(59.05,15.88) v1(59.05,13.33) v1(59.05,10.8) v1(61.59,222.25) v1(61.59,219.71) v1(61.59,217.17) v1(61.59,214.63) v1(61.59,212.09) v1(61.59,209.55) v1(61.59,207.01) v1(63.5,222.25) v1(63.5,219.71) v1(63.5,217.17) v1(63.5,214.63) v1(63.5,212.09) v1(63.5,209.55) v1(63.5,207.01) v1(66.04,222.25) v1(66.04,219.71) v1(66.04,217.17) v1(66.04,214.63) v1(66.04,212.09) v1(66.04,209.55) v1(66.04,207.01) v1(67.94,222.25) v1(67.94,219.71) v1(67.94,217.17) v1(67.94,214.63) v1(67.94,212.09) v1(67.94,209.55) v1(67.94,207.01) v1(70.48,222.25) v1(70.48,219.71) v1(70.48,217.17) v1(70.48,214.63) v1(70.48,212.09) v1(70.48,209.55) v1(70.48,207.01) v1(78.74,19.69) v1(78.74,17.14) v1(78.74,14.61) v1(78.74,12.06) v1(103.5,222.25) v1(103.5,219.71) v1(103.5,217.17) v1(103.5,214.63) v1(103.5,212.09) v1(103.5,209.55) v1(103.5,207.01) v1(107.95,222.25) v1(107.95,219.71) v1(107.95,217.17) v1(107.95,214.63) v1(107.95,212.09) v1(107.95,209.55) v1(107.95,207.01) v1(110.49,16.51) v1(110.49,15.24) v1(110.49,13.97) v1(112.39,222.25) v1(112.39,219.71) v1(112.39,217.17) v1(112.39,214.63) v1(112.39,212.09) v1(112.39,209.55) v1(112.39,207.01) v1(113.03,22.22) v1(113.03,20.32) v1(113.03,18.41) v1(113.03,16.51) v1(113.03,15.24) v1(113.03,13.97) v1(113.03,11.43) v1(113.03,6.98) v1(113.03,5.08) v1(115.57,222.88) v1(115.57,220.34) v1(115.57,217.81) v1(115.57,215.26) v1(115.57,212.72) v1(115.57,210.19) v1(115.57,207.64) v1(115.57,22.22) v1(115.57,20.32) v1(115.57,18.41) v1(115.57,16.51) v1(115.57,15.24) v1(115.57,13.97) v1(115.57,11.43) v1(115.57,6.98) v1(115.57,5.08) v1(118.11,22.22) v1(118.11,20.32) v1(118.11,18.41) v1(118.11,16.51) v1(118.11,15.24) v1(118.11,13.97) v1(118.11,11.43) v1(118.11,6.98) v1(118.11,5.08) v1(118.11,2.54) v1(120.65,22.22) v1(120.65,20.32) v1(120.65,18.41) v1(120.65,16.51) v1(120.65,15.24) v1(120.65,13.97) v1(120.65,11.43) v1(120.65,6.98) v1(120.65,5.08) v1(120.65,2.54) v1(123.19,22.22) v1(123.19,20.32) v1(123.19,18.41) v1(123.19,16.51) v1(123.19,15.24) v1(123.19,13.97) v1(123.19,11.43) v1(123.19,6.98) v1(123.19,5.08) v1(123.19,2.54) v1(125.73,22.22) v1(125.73,20.32) v1(125.73,18.41) v1(125.73,16.51) v1(125.73,15.24) v1(125.73,13.97) v1(125.73,11.43) v1(125.73,6.98) v1(125.73,5.08) v1(125.73,2.54) v1(127.63,13.97) v1(128.27,22.22) v1(128.27,20.32) v1(128.27,18.41) v1(128.27,11.43) v1(128.27,6.98) v1(128.27,5.08) v1(128.91,2.54) v1(130.18,13.97) v1(131.44,11.43) v1(131.44,6.98) v1(131.44,5.08) v1(131.44,2.54) v1(132.72,13.97) v1(133.98,11.43) v1(133.98,6.98) v1(133.98,5.08) v1(133.98,2.54) v1(135.25,13.97) v1(136.53,11.43) v1(136.53,6.98) v1(136.53,5.08) v1(136.53,2.54) v1(137.79,13.97) v1(139.06,11.43) v1(139.06,6.98) v1(139.06,5.08) v1(139.06,2.54) v1(140.34,13.97) v1(141.6,11.43) v1(141.6,6.98) v1(141.6,5.08) v1(141.6,2.54) v1(142.88,13.97) v1(144.14,11.43) v1(144.14,6.98) v1(144.14,5.08) v1(144.14,2.54) v1(144.47,16.2) v1(146.27,18) v1(146.38,16.2) v1(146.69,11.43) v1(146.69,6.98) v1(146.69,5.08) v1(146.69,2.54) v1(147.32,208.28) v1(147.32,205.74) v1(148.06,19.79) v1(148.17,18) v1(149.86,215.9) v1(149.86,213.36) v1(149.86,210.82) v1(149.86,208.28) v1(149.86,205.74) v1(149.86,21.59) v1(149.97,19.79) v1(150.19,4.77) v1(151.76,21.59) v1(151.98,6.57) v1(152.4,215.9) v1(152.4,213.36) v1(152.4,210.82) v1(152.4,208.28) v1(152.4,205.74) v1(153.67,200.66) v1(153.67,198.75) v1(153.78,8.36) v1(154,4.14) v1(154.94,215.9) v1(154.94,213.36) v1(154.94,210.82) v1(154.94,208.28) v1(154.94,205.74) v1(155.57,10.16) v1(155.79,5.93) v1(156.21,200.66) v1(156.21,198.75) v1(156.84,21.59) v1(156.84,19.05) v1(156.84,16.51) v1(156.84,13.97) v1(157.48,215.9) v1(157.48,213.36) v1(157.48,210.82) v1(157.48,208.28) v1(157.48,205.74) v1(157.59,7.73) v1(158.75,200.66) v1(158.75,198.75) v1(159.38,21.59) v1(159.38,19.05) v1(159.38,16.51) v1(159.38,13.97) v1(159.38,9.52) v1(160.02,215.9) v1(160.02,213.36) v1(160.02,210.82) v1(160.02,208.28) v1(160.02,205.74) v1(161.29,200.66) v1(161.29,198.75) v1(162.56,215.9) v1(162.56,213.36) v1(162.56,210.82) v1(162.56,208.28) v1(162.56,205.74) v1(162.56,20.32) v1(162.56,17.78) v1(162.56,15.24) v1(162.56,12.7) v1(162.56,10.16) v1(162.56,7.62) v1(162.56,5.08) v1(163.83,200.66) v1(163.83,198.75) v1(165.1,215.9) v1(165.1,213.36) v1(165.1,210.82) v1(165.1,208.28) v1(165.1,205.74) v1(166.37,200.66) v1(166.37,198.75) v1(166.37,20.32) v1(166.37,17.78) v1(166.37,15.24) v1(166.37,12.7) v1(167.64,215.9) v1(167.64,213.36) v1(167.64,210.82) v1(167.64,208.28) v1(167.64,205.74) v1(167.64,5.08) v1(167.64,2.54) v1(168.91,200.66) v1(168.91,198.75) v1(170.18,215.9) v1(170.18,213.36) v1(170.18,210.82) v1(170.18,5.08) v1(170.18,2.54) v1(170.51,32.08) v1(172.3,33.87) v1(172.72,5.08) v1(172.72,2.54) v1(174.1,35.67) v1(175.26,226.06) v1(175.26,223.52) v1(175.26,220.98) v1(175.26,218.44) v1(175.26,215.9) v1(175.26,213.36) v1(175.26,210.82) v1(175.26,208.28) v1(175.26,205.74) v1(175.26,5.08) v1(175.26,2.54) v1(175.89,37.47) v1(176.53,200.66) v1(176.53,198.12) v1(176.53,195.58) v1(176.53,193.04) v1(177.8,226.06) v1(177.8,223.52) v1(177.8,220.98) v1(177.8,218.44) v1(177.8,215.9) v1(177.8,213.36) v1(177.8,210.82) v1(177.8,208.28) v1(177.8,205.74) v1(177.8,5.08) v1(177.8,2.54) v1(178.76,178.13) v1(179.07,200.66) v1(179.07,198.12) v1(179.07,195.58) v1(179.07,193.04) v1(180.34,226.06) v1(180.34,223.52) v1(180.34,220.98) v1(180.34,218.44) v1(180.34,215.9) v1(180.34,213.36) v1(180.34,210.82) v1(180.34,208.28) v1(180.34,205.74) v1(180.34,5.08) v1(180.34,2.54) v1(180.56,179.92) v1(181.61,200.66) v1(181.61,198.12) v1(181.61,195.58) v1(181.61,193.04) v1(182.35,181.72) v1(182.88,226.06) v1(182.88,223.52) v1(182.88,220.98) v1(182.88,218.44) v1(182.88,215.9) v1(182.88,213.36) v1(182.88,210.82) v1(182.88,208.28) v1(182.88,205.74) v1(182.88,5.08) v1(182.88,2.54) v1(184.15,200.66) v1(184.15,198.12) v1(184.15,195.58) v1(184.15,193.04) v1(184.15,183.51) v1(185.42,226.06) v1(185.42,223.52) v1(185.42,220.98) v1(185.42,218.44) v1(185.42,215.9) v1(185.42,213.36) v1(185.42,210.82) v1(185.42,208.28) v1(185.42,205.74) v1(185.42,17.78) v1(185.42,15.24) v1(185.42,5.08) v1(185.42,2.54) v1(186.69,12.7) v1(186.69,12.06) v1(186.69,11.43) v1(187.32,11.43) v1(187.96,226.06) v1(187.96,223.52) v1(187.96,220.98) v1(187.96,218.44) v1(187.96,215.9) v1(187.96,213.36) v1(187.96,210.82) v1(187.96,208.28) v1(187.96,205.74) v1(187.96,17.78) v1(187.96,15.24) v1(187.96,12.7) v1(187.96,12.06) v1(187.96,11.43) v1(187.96,5.08) v1(187.96,2.54) v1(188.59,175.89) v1(188.59,173.99) v1(188.59,12.7) v1(188.59,12.06) v1(188.59,11.43) v1(189.23,12.7) v1(189.23,12.06) v1(189.23,11.43) v1(189.87,12.7) v1(189.87,12.06) v1(189.87,11.43) v1(190.5,226.06) v1(190.5,223.52) v1(190.5,220.98) v1(190.5,218.44) v1(190.5,215.9) v1(190.5,213.36) v1(190.5,210.82) v1(190.5,208.28) v1(190.5,205.74) v1(190.5,200.66) v1(190.5,198.12) v1(190.5,195.58) v1(190.5,193.04) v1(190.5,186.06) v1(190.5,183.51) v1(190.5,180.97) v1(190.5,45.72) v1(190.5,43.18) v1(190.5,17.78) v1(190.5,15.24) v1(190.5,5.08) v1(190.5,2.54) v1(191.13,175.89) v1(191.13,173.99) v1(193.04,226.06) v1(193.04,223.52) v1(193.04,220.98) v1(193.04,218.44) v1(193.04,215.9) v1(193.04,213.36) v1(193.04,210.82) v1(193.04,208.28) v1(193.04,205.74) v1(193.04,200.66) v1(193.04,198.12) v1(193.04,195.58) v1(193.04,193.04) v1(193.04,186.06) v1(193.04,183.51) v1(193.04,180.97) v1(193.04,54.61) v1(193.04,52.7) v1(193.04,45.72) v1(193.04,43.18) v1(193.04,17.78) v1(193.04,15.24) v1(193.04,2.54) v1(193.68,175.89) v1(193.68,173.99) v1(195.58,226.06) v1(195.58,223.52) v1(195.58,220.98) v1(195.58,218.44) v1(195.58,215.9) v1(195.58,213.36) v1(195.58,210.82) v1(195.58,208.28) v1(195.58,205.74) v1(195.58,200.66) v1(195.58,198.12) v1(195.58,195.58) v1(195.58,193.04) v1(195.58,186.06) v1(195.58,183.51) v1(195.58,180.97) v1(195.58,54.61) v1(195.58,52.7) v1(195.58,45.72) v1(195.58,43.18) v1(195.58,17.78) v1(195.58,15.24) v1(195.58,2.54) v1(196.22,175.89) v1(196.22,173.99) v1(197.18,63.19) v1(198.12,226.06) v1(198.12,223.52) v1(198.12,220.98) v1(198.12,218.44) v1(198.12,215.9) v1(198.12,213.36) v1(198.12,210.82) v1(198.12,208.28) v1(198.12,205.74) v1(198.12,200.66) v1(198.12,198.12) v1(198.12,195.58) v1(198.12,193.04) v1(198.12,186.06) v1(198.12,183.51) v1(198.12,180.97) v1(198.12,54.61) v1(198.12,52.7) v1(198.12,45.72) v1(198.12,43.18) v1(198.12,17.78) v1(198.12,15.24) v1(198.12,2.54) v1(198.45,66.37) v1(198.75,175.89) v1(198.75,173.99) v1(198.97,64.99) v1(200.24,68.16) v1(200.66,226.06) v1(200.66,223.52) v1(200.66,220.98) v1(200.66,218.44) v1(200.66,215.9) v1(200.66,213.36) v1(200.66,210.82) v1(200.66,208.28) v1(200.66,205.74) v1(200.66,200.66) v1(200.66,198.12) v1(200.66,195.58) v1(200.66,193.04) v1(200.66,186.06) v1(200.66,183.51) v1(200.66,180.97) v1(200.66,54.61) v1(200.66,52.7) v1(200.66,45.72) v1(200.66,43.18) v1(200.66,17.78) v1(200.66,15.24) v1(200.77,66.78) v1(201.3,175.89) v1(201.3,173.99) v1(201.93,142.24) v1(201.93,139.7) v1(201.93,137.16) v1(201.93,134.62) v1(202.04,69.96) v1(202.56,68.58) v1(203.2,226.06) v1(203.2,223.52) v1(203.2,220.98) v1(203.2,218.44) v1(203.2,215.9) v1(203.2,213.36) v1(203.2,210.82) v1(203.2,208.28) v1(203.2,205.74) v1(203.2,200.66) v1(203.2,198.12) v1(203.2,195.58) v1(203.2,193.04) v1(203.2,186.06) v1(203.2,183.51) v1(203.2,180.97) v1(203.2,54.61) v1(203.2,52.7) v1(203.2,45.72) v1(203.2,43.18) v1(203.2,17.78) v1(203.2,15.24) v1(203.83,175.89) v1(203.83,173.99) v1(203.83,170.81) v1(203.83,168.28) v1(203.83,165.74) v1(203.83,163.19) v1(203.83,160.66) v1(203.83,158.12) v1(203.83,155.57) v1(203.83,71.75) v1(204.47,143.51) v1(204.47,140.97) v1(204.47,138.43) v1(204.47,135.89) v1(205.74,226.06) v1(205.74,223.52) v1(205.74,220.98) v1(205.74,218.44) v1(205.74,215.9) v1(205.74,213.36) v1(205.74,210.82) v1(205.74,208.28) v1(205.74,205.74) v1(205.74,200.66) v1(205.74,198.12) v1(205.74,195.58) v1(205.74,193.04) v1(205.74,186.06) v1(205.74,183.51) v1(205.74,180.97) v1(205.74,170.81) v1(205.74,168.28) v1(205.74,165.74) v1(205.74,163.19) v1(205.74,160.66) v1(205.74,158.12) v1(205.74,155.57) v1(205.74,54.61) v1(205.74,52.7) v1(205.74,45.72) v1(205.74,43.18) v1(205.74,17.78) v1(205.74,15.24) v1(207.01,132.72) v1(207.01,130.18) v1(207.01,127.63) v1(207.01,125.09) v1(207.01,122.55) v1(207.01,120.02) v1(207.01,117.47) v1(207.01,114.94) v1(207.64,93.98) v1(207.64,91.44) v1(207.64,88.9) v1(207.64,86.36) v1(207.64,83.82) v1(207.64,81.28) v1(207.64,78.74) v1(207.64,76.83) v1(207.64,74.29) v1(207.64,71.75) v1(207.64,69.22) v1(207.64,66.67) v1(207.64,64.13) v1(207.64,61.59) v1(208.28,226.06) v1(208.28,223.52) v1(208.28,208.28) v1(208.28,200.66) v1(208.28,198.12) v1(208.28,195.58) v1(208.28,193.04) v1(208.28,54.61) v1(208.28,52.7) v1(208.28,17.78) v1(208.28,15.24) v1(209.55,183.51) v1(209.55,180.97) v1(209.55,178.44) v1(209.55,175.89) v1(210.19,167.64) v1(210.19,165.1) v1(210.19,162.56) v1(210.19,160.02) v1(210.19,157.48) v1(210.19,154.94) v1(210.19,152.4) v1(210.19,132.08) v1(210.19,129.54) v1(210.19,127) v1(210.19,124.46) v1(210.19,121.92) v1(210.19,119.38) v1(210.19,116.84) v1(210.82,226.06) v1(210.82,223.52) v1(210.82,208.28) v1(210.82,200.66) v1(210.82,198.12) v1(210.82,195.58) v1(210.82,193.04) v1(210.82,93.34) v1(210.82,90.8) v1(210.82,88.27) v1(210.82,85.72) v1(210.82,83.19) v1(210.82,80.64) v1(210.82,78.1) v1(210.82,75.56) v1(210.82,73.03) v1(210.82,70.48) v1(210.82,67.94) v1(210.82,65.41) v1(210.82,62.86) v1(210.82,60.32) v1(211.45,182.25) v1(211.45,179.7) v1(211.45,177.16) v1(211.45,174.62) v1(213.36,226.06) v1(213.36,223.52) v1(213.36,208.28) v1(215.26,180.34) v1(215.26,177.8) v1(215.26,175.26) v1(215.26,172.72) v1(215.9,226.06) v1(215.9,223.52) v1(215.9,208.28) v1(216.53,220.98) v1(218.44,226.06) v1(218.44,223.52) v1(218.44,208.28) v1(218.44,205.74) v1(218.44,203.2) v1(218.44,200.66) v1(218.44,198.12) v1(218.44,195.58) v1(218.44,193.04) v1(218.44,190.5) v1(218.44,187.96) v1(218.44,185.42) v1(218.44,182.88) v1(218.44,180.34) v1(218.44,177.8) v1(218.44,175.26) v1(218.44,172.72) v1(218.44,170.18) v1(218.44,167.64) v1(218.44,165.1) v1(218.44,162.56) v1(218.44,160.02) v1(218.44,157.48) v1(218.44,154.94) v1(218.44,152.4) v1(218.44,149.86) v1(218.44,147.32) v1(218.44,144.78) v1(218.44,142.24) v1(218.44,139.7) v1(218.44,137.16) v1(218.44,134.62) v1(218.44,132.08) v1(218.44,129.54) v1(218.44,127) v1(218.44,124.46) v1(218.44,121.92) v1(218.44,119.38) v1(218.44,116.84) v1(218.44,114.3) v1(218.44,111.76) v1(218.44,109.22) v1(218.44,106.68) v1(218.44,104.14) v1(218.44,101.6) v1(218.44,99.06) v1(218.44,96.52) v1(218.44,93.98) v1(218.44,91.44) v1(218.44,88.9) v1(218.44,86.36) v1(218.44,83.82) v1(218.44,81.28) v1(218.44,78.74) v1(218.44,76.2) v1(218.44,73.66) v1(218.44,71.12) v1(218.44,68.58) v1(218.44,66.04) v1(218.44,63.5) v1(218.44,60.96) v1(218.44,58.42) v1(218.44,55.88) v1(218.44,53.34) v1(218.44,50.8) v1(218.44,48.26) v1(218.44,45.72) v1(220.98,205.74) v1(220.98,203.2) v1(220.98,200.66) v1(220.98,198.12) v1(220.98,195.58) v1(220.98,193.04) v1(220.98,190.5) v1(220.98,187.96) v1(220.98,185.42) v1(220.98,182.88) v1(220.98,180.34) v1(220.98,177.8) v1(220.98,175.26) v1(220.98,172.72) v1(220.98,170.18) v1(220.98,167.64) v1(220.98,165.1) v1(220.98,162.56) v1(220.98,160.02) v1(220.98,157.48) v1(220.98,154.94) v1(220.98,152.4) v1(220.98,149.86) v1(220.98,147.32) v1(220.98,144.78) v1(220.98,142.24) v1(220.98,139.7) v1(220.98,137.16) v1(220.98,134.62) v1(220.98,132.08) v1(220.98,129.54) v1(220.98,127) v1(220.98,124.46) v1(220.98,121.92) v1(220.98,119.38) v1(220.98,116.84) v1(220.98,114.3) v1(220.98,111.76) v1(220.98,109.22) v1(220.98,106.68) v1(220.98,104.14) v1(220.98,101.6) v1(220.98,99.06) v1(220.98,96.52) v1(220.98,93.98) v1(220.98,91.44) v1(220.98,88.9) v1(220.98,86.36) v1(220.98,83.82) v1(220.98,81.28) v1(220.98,78.74) v1(220.98,76.2) v1(220.98,73.66) v1(220.98,71.12) v1(220.98,68.58) v1(220.98,66.04) v1(220.98,63.5) v1(220.98,60.96) v1(220.98,58.42) v1(220.98,55.88) v1(220.98,53.34) v1(220.98,50.8) v1(220.98,48.26) v1(220.98,45.72)
